# Altium PCB WiFi_Card_PCB.PcbDoc
Units mil, origin at the board's own origin, x right, y up, seen from the top; angles counter-clockwise.
Board outline 5600 x 4000 mil, 4 copper layers (Top Layer, Plane(Gnd), Layer 2, Bottom Layer), stack 23.756 mil thick; 152 components, 169 nets, 435 pads, 98 vias.
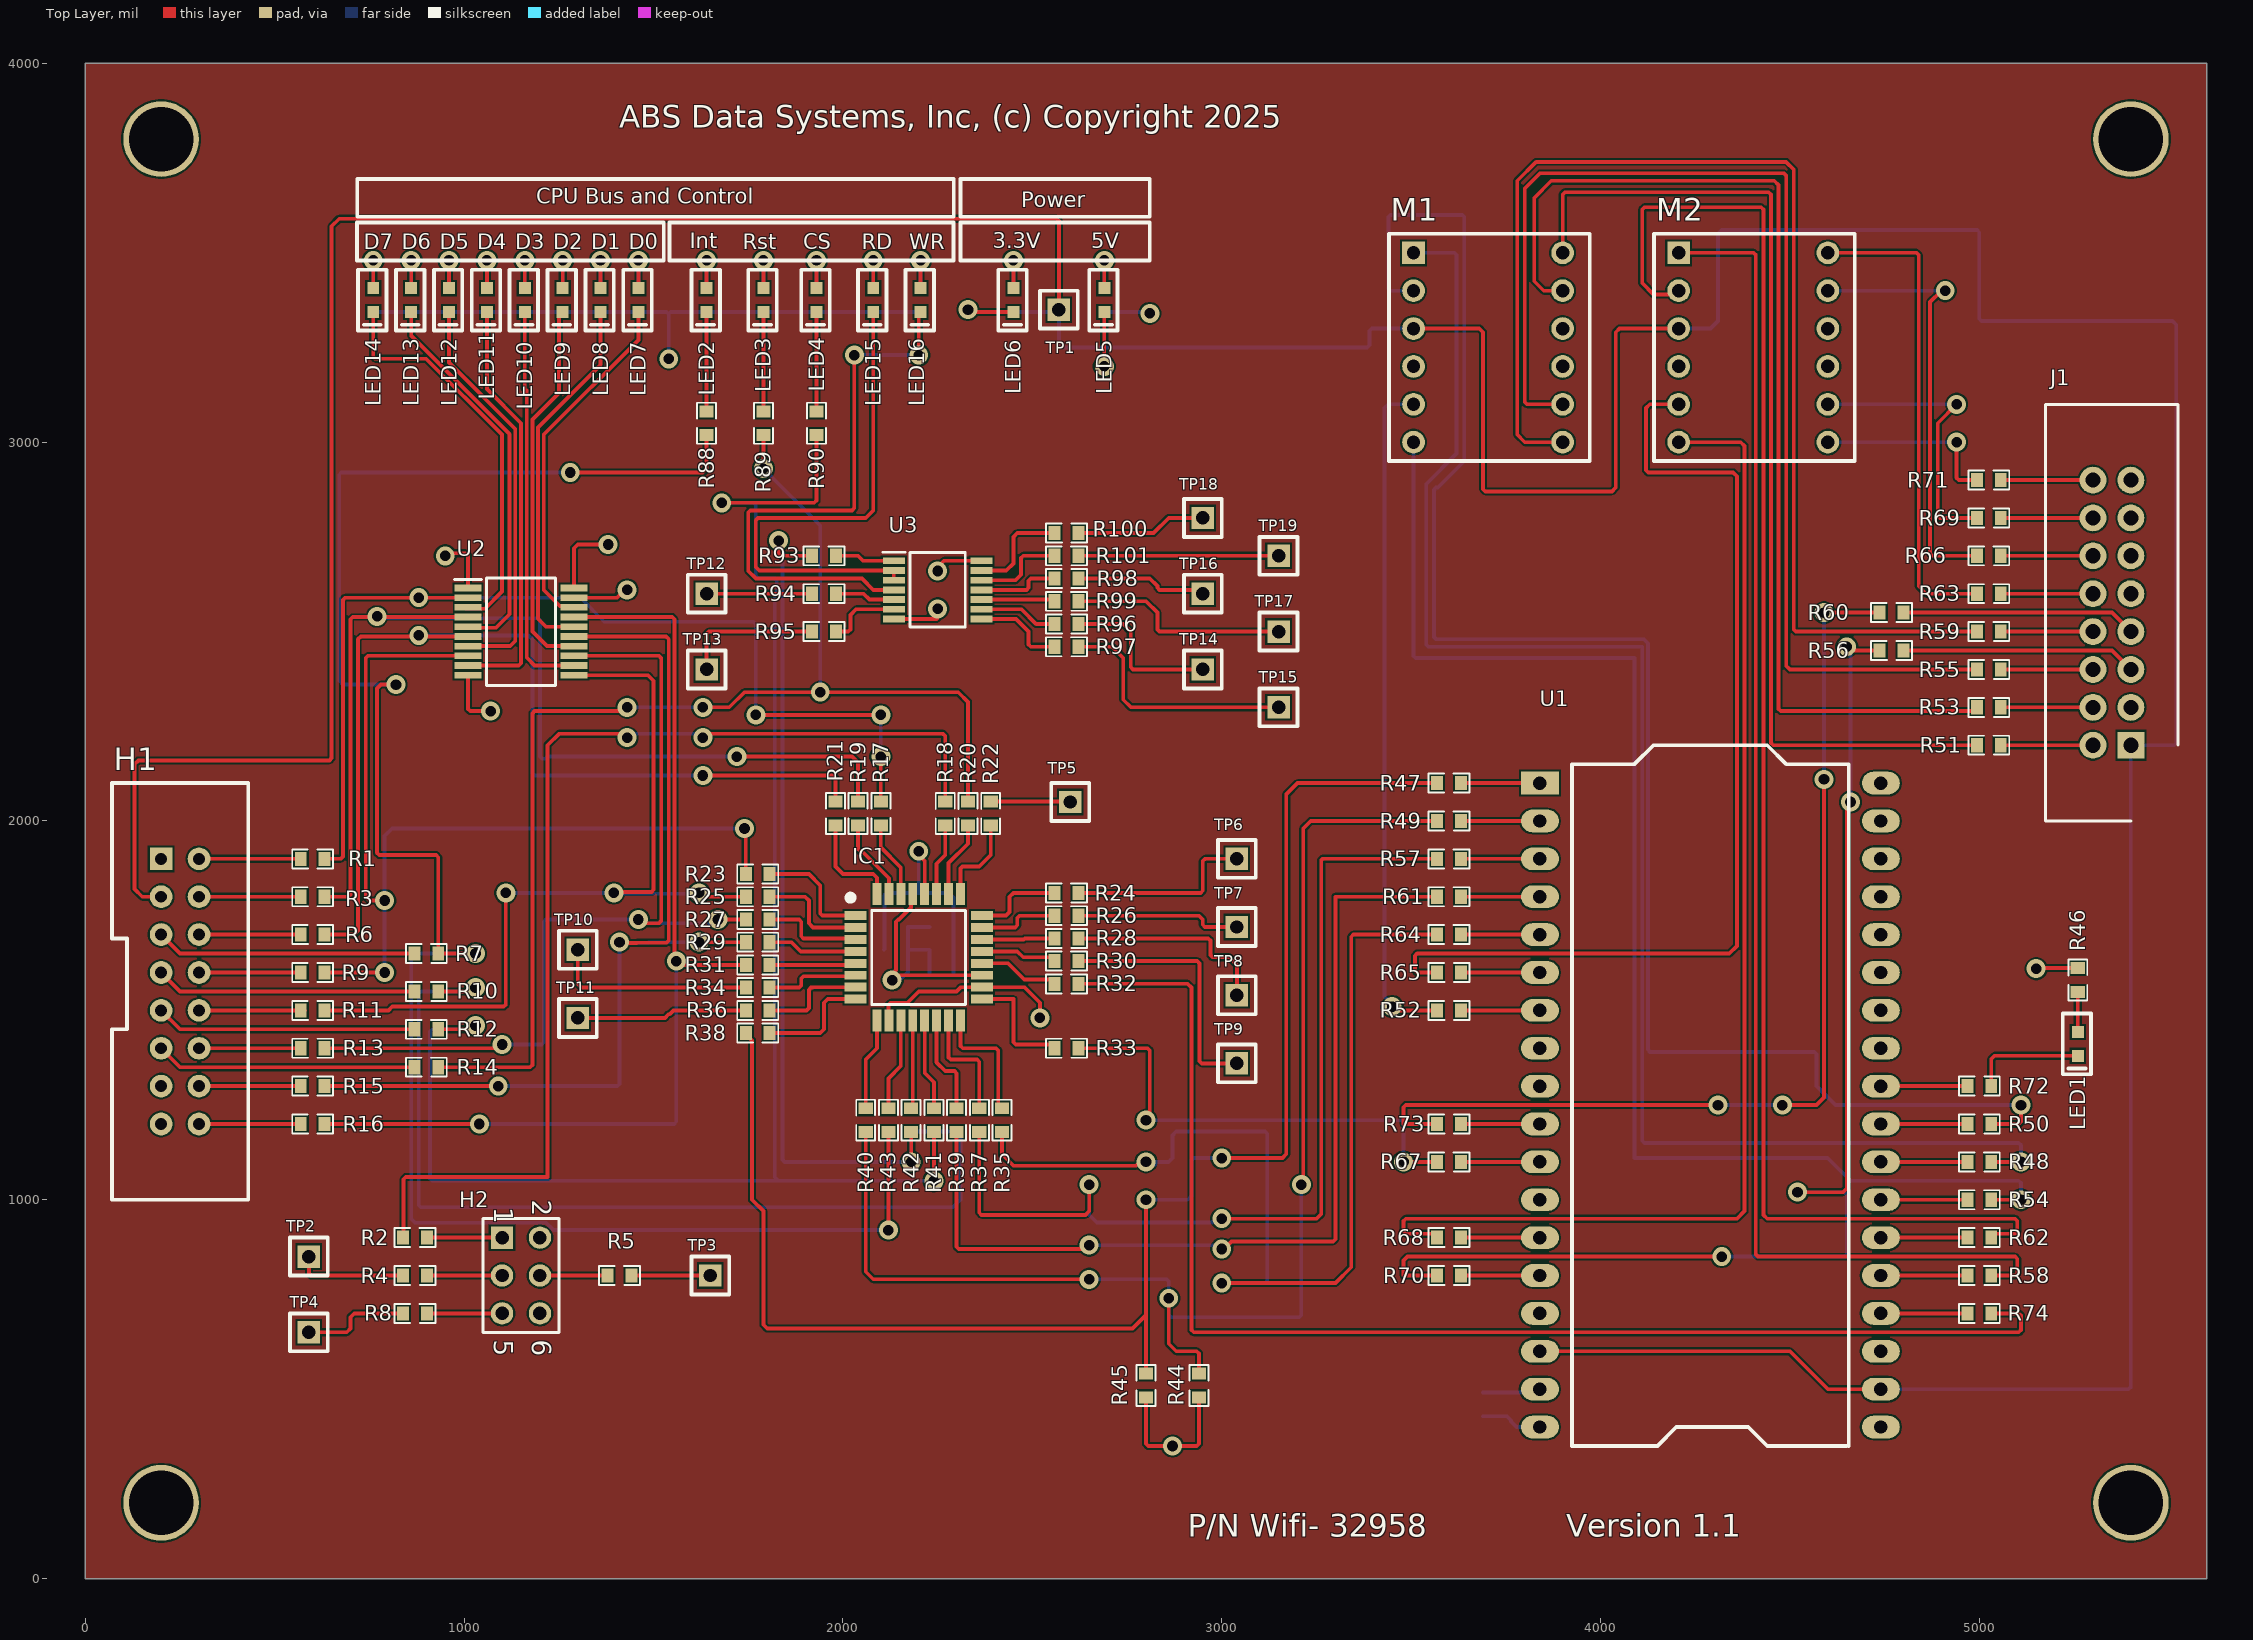
[diagram p0: Top Layer view]
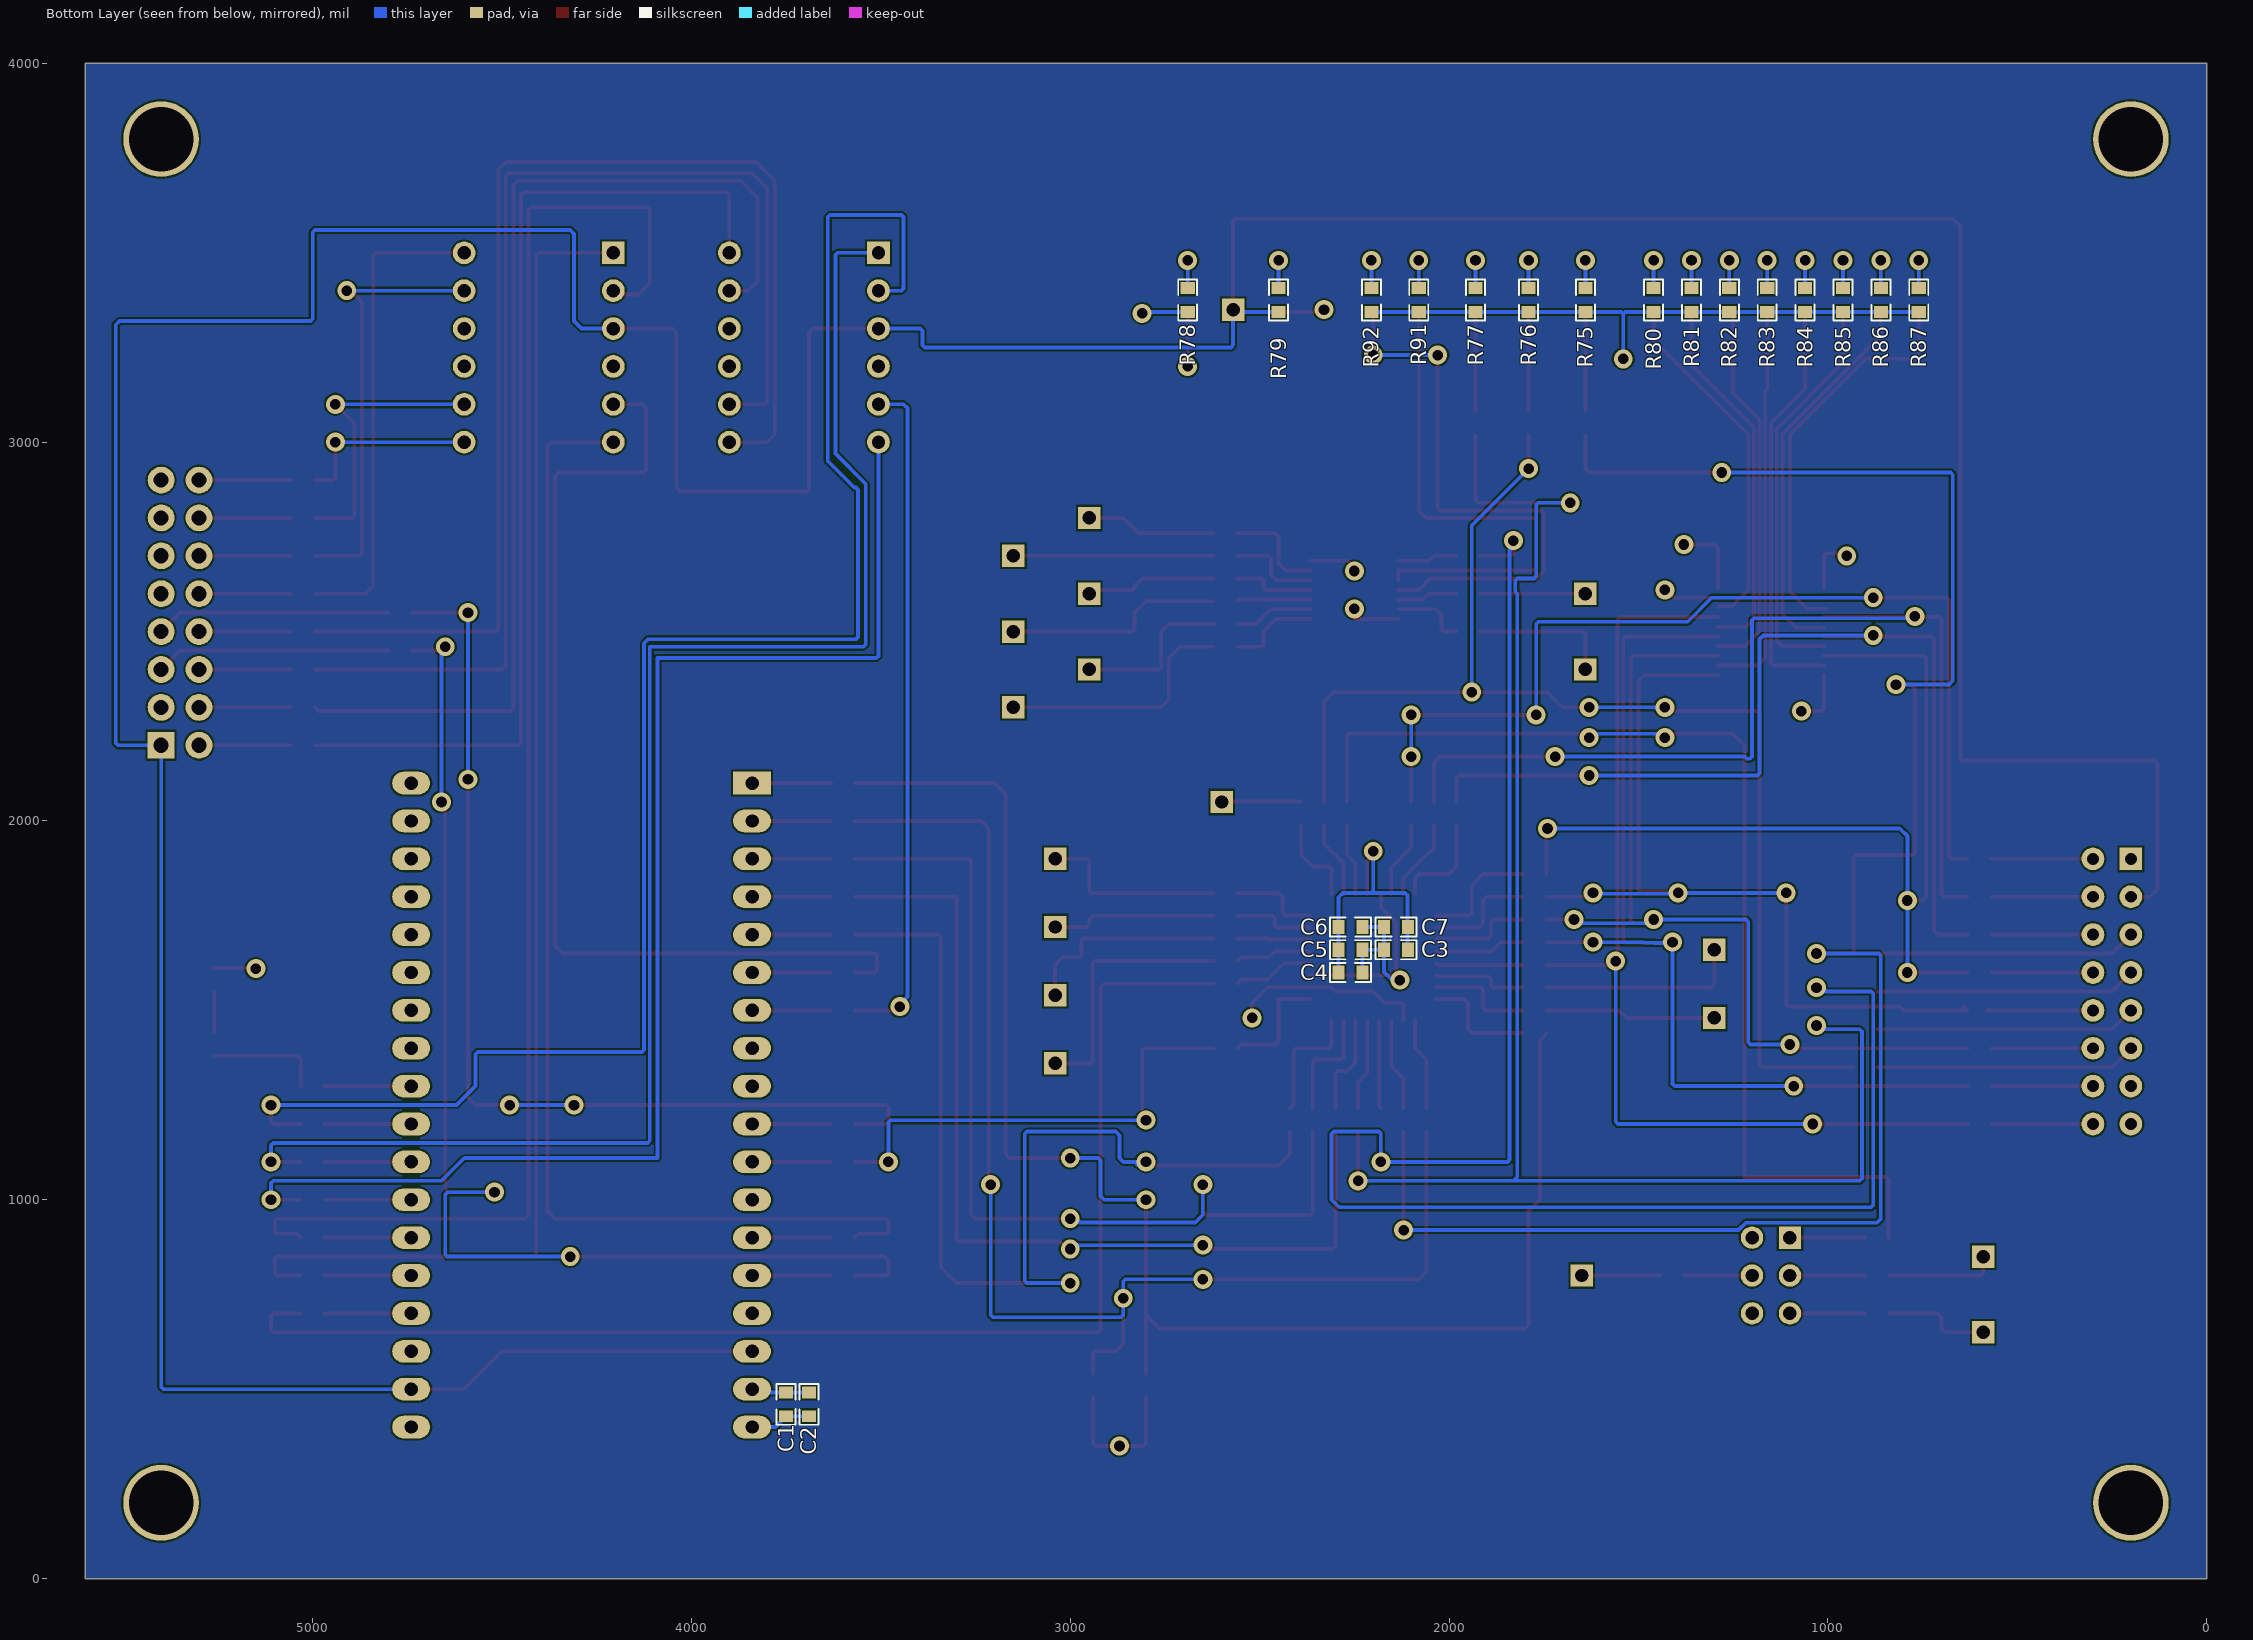
[diagram p1: Bottom Layer view, seen from below]
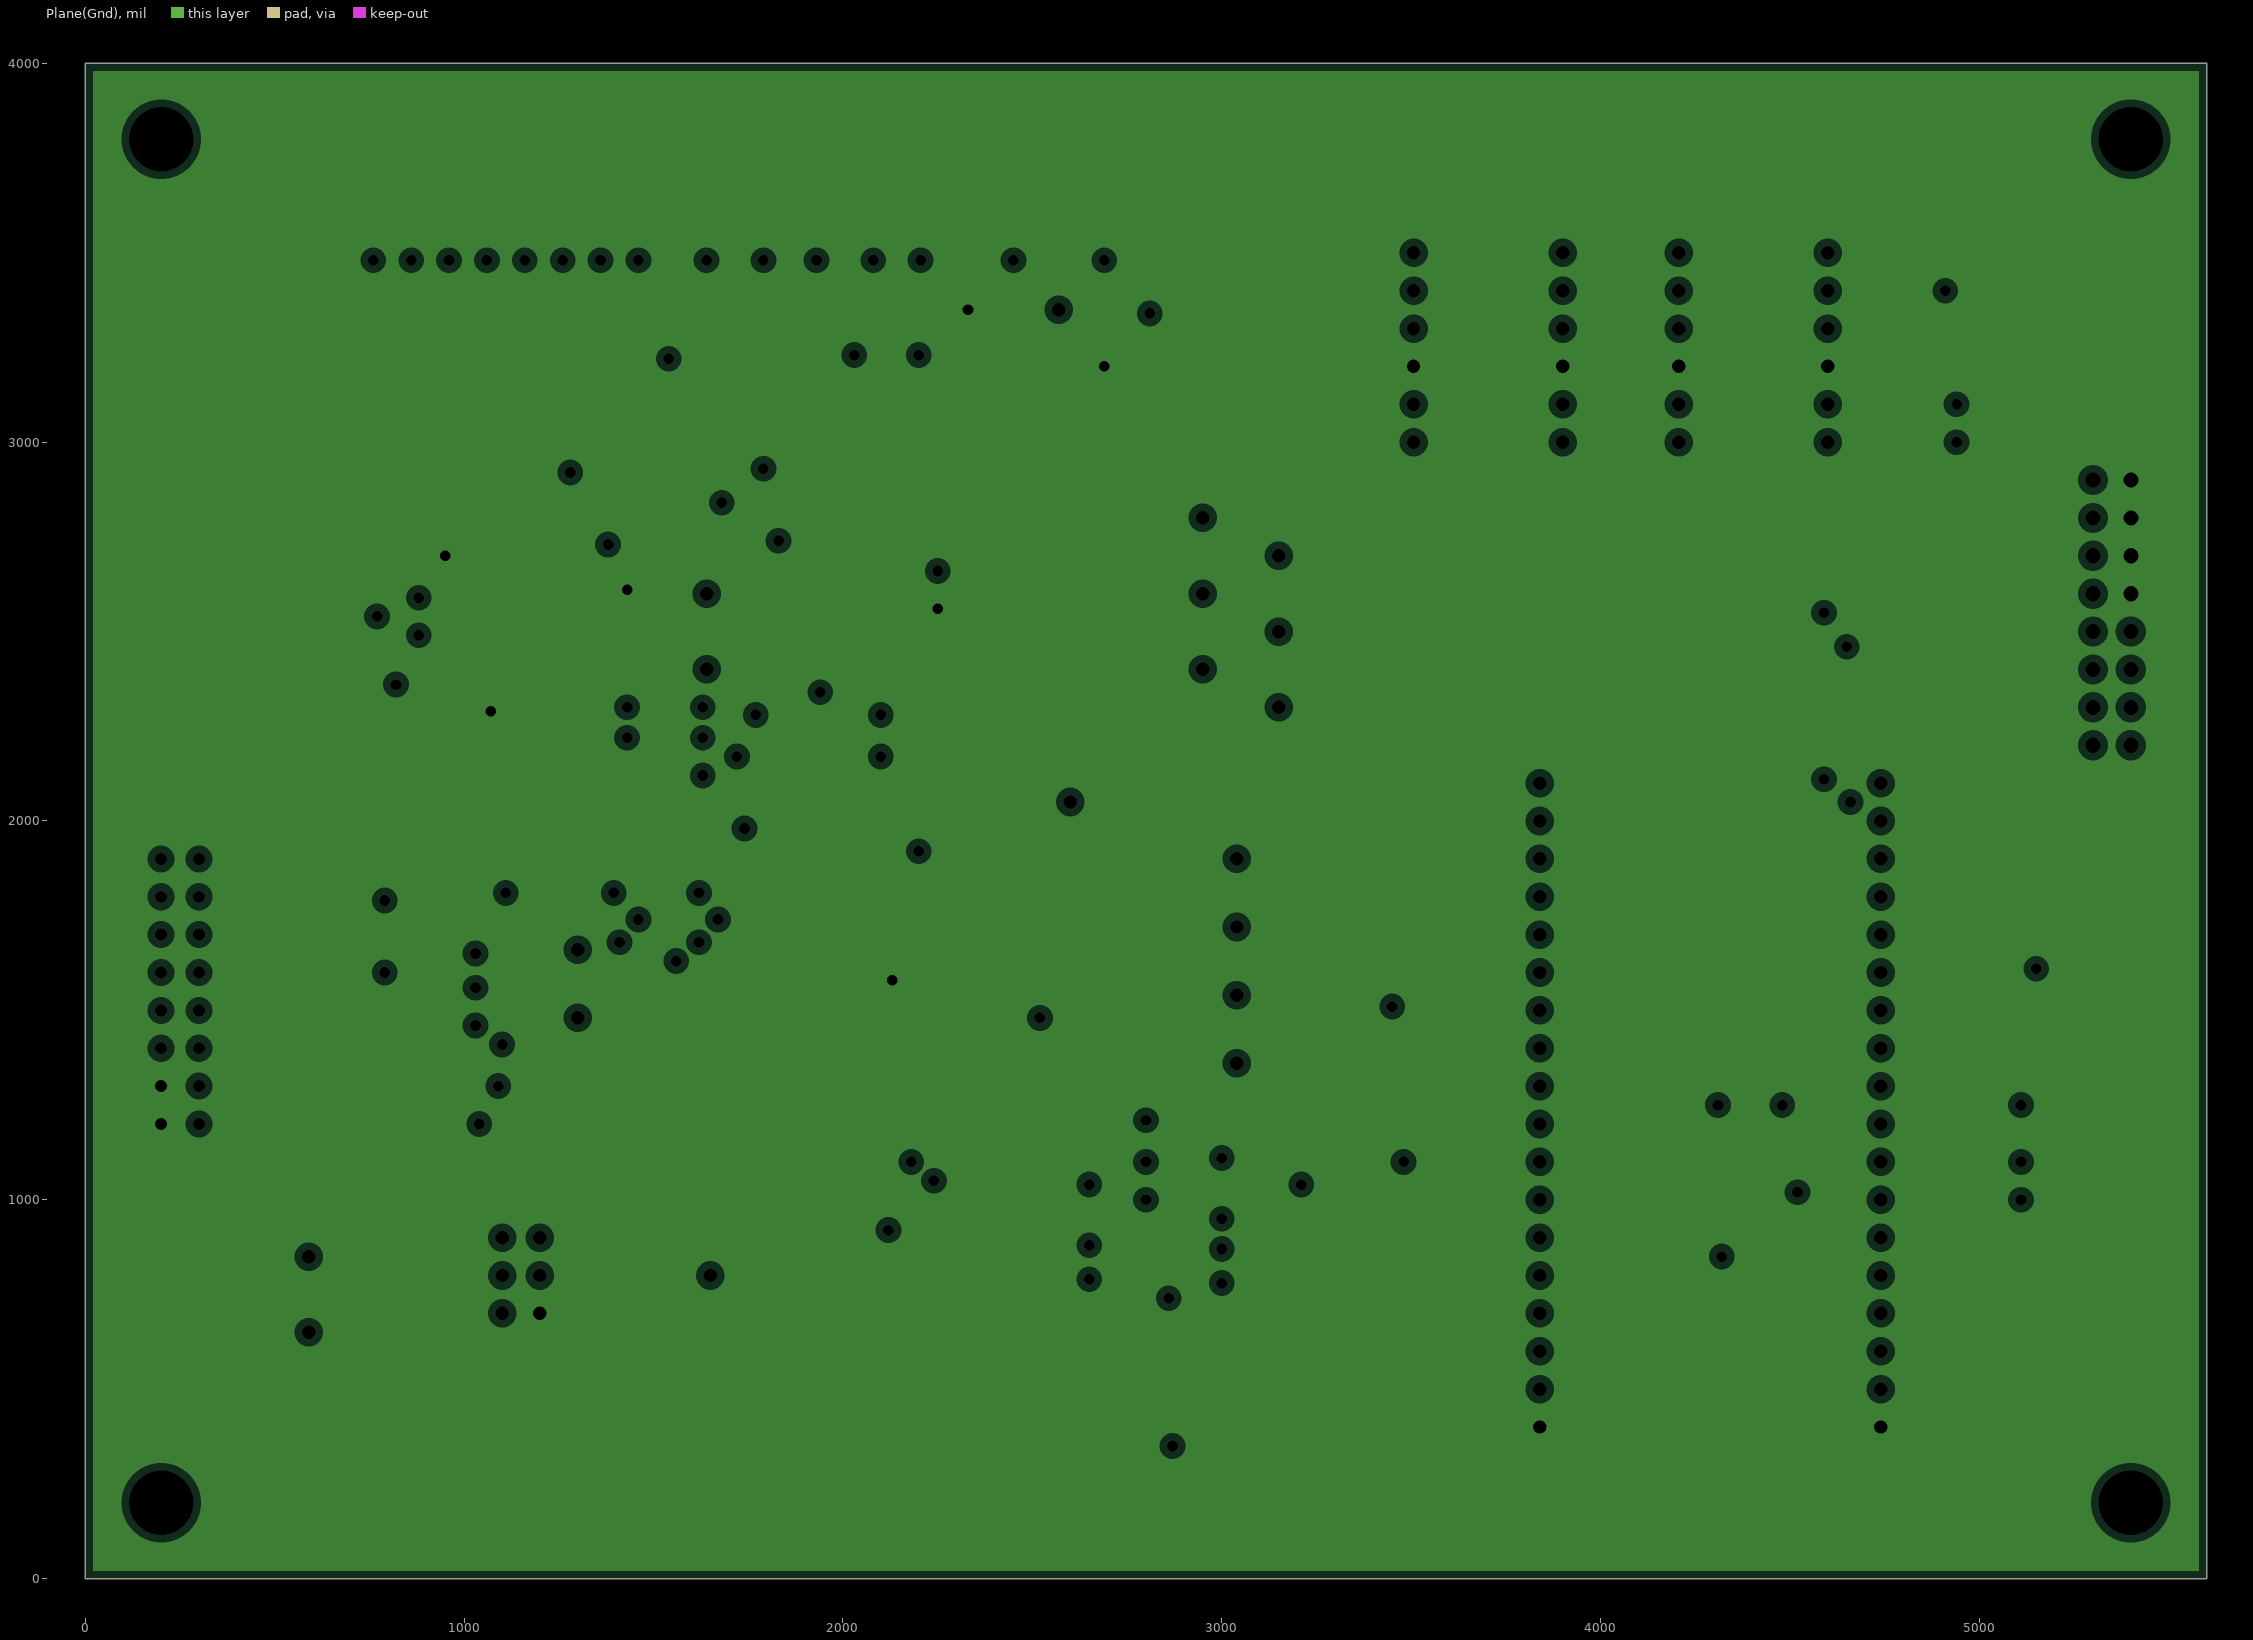
[diagram p2: Plane(Gnd), clearances drawn from the general rule]
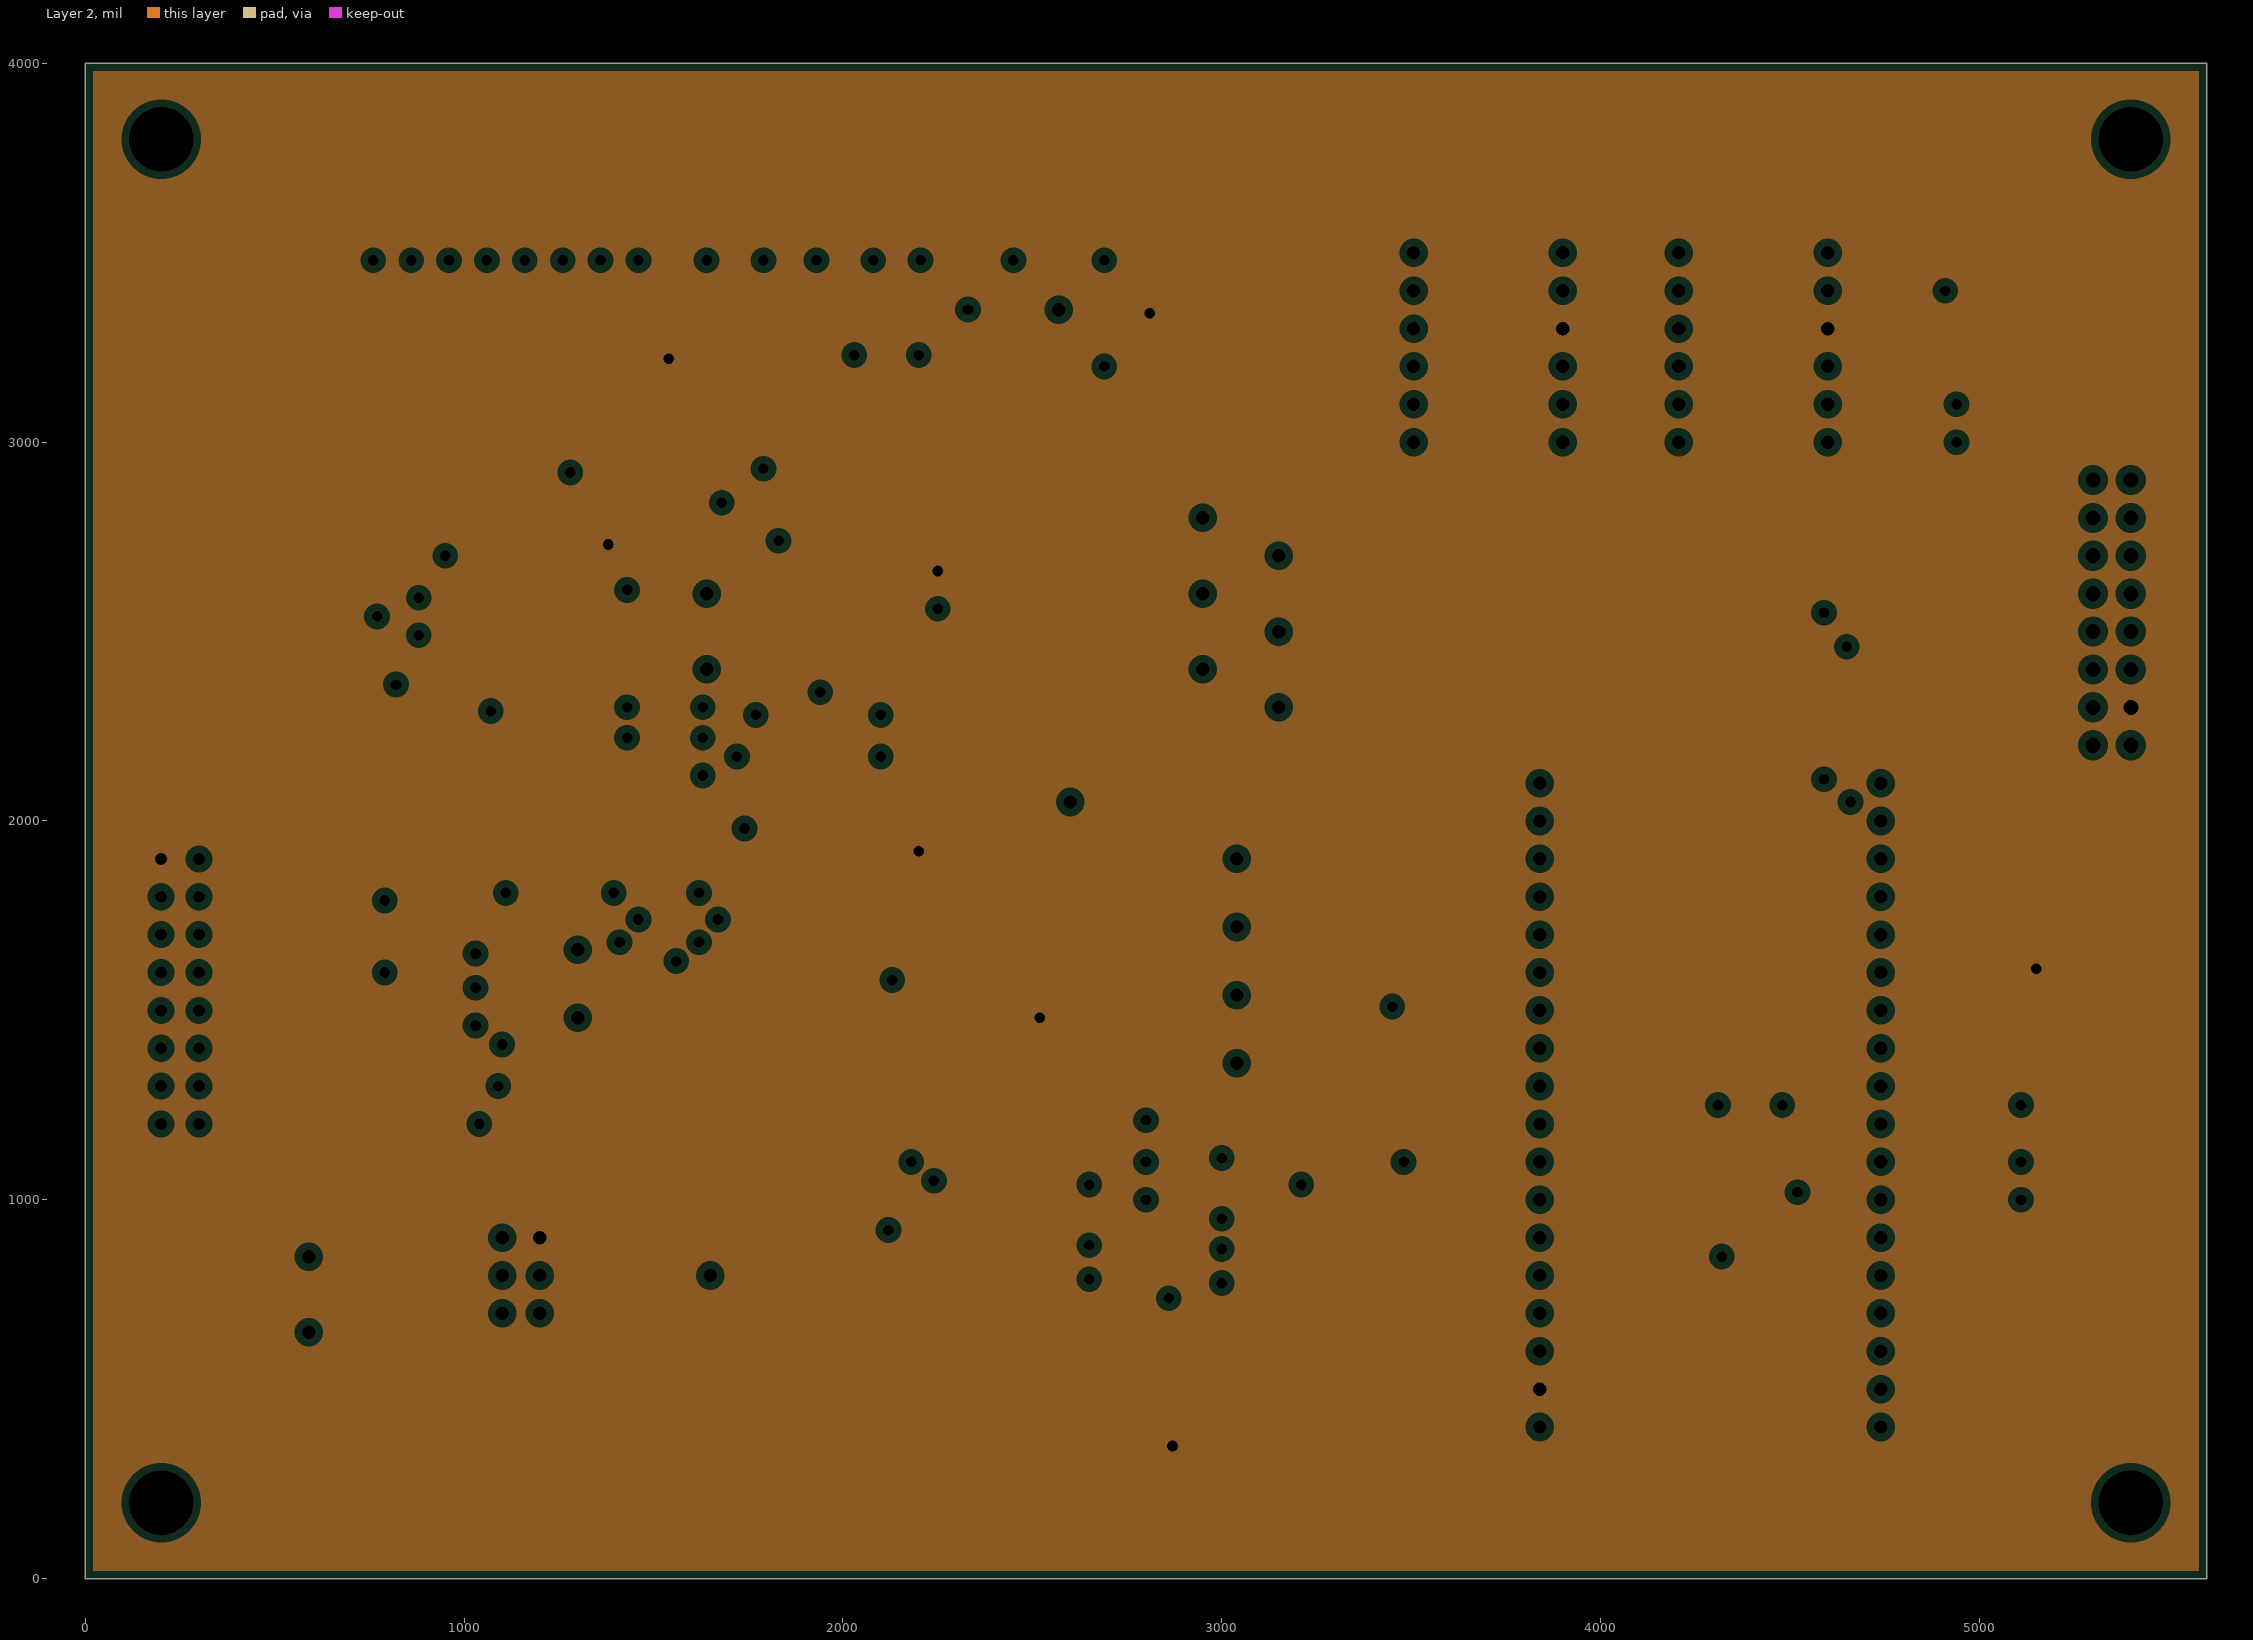
[diagram p3: Layer 2, clearances drawn from the general rule]
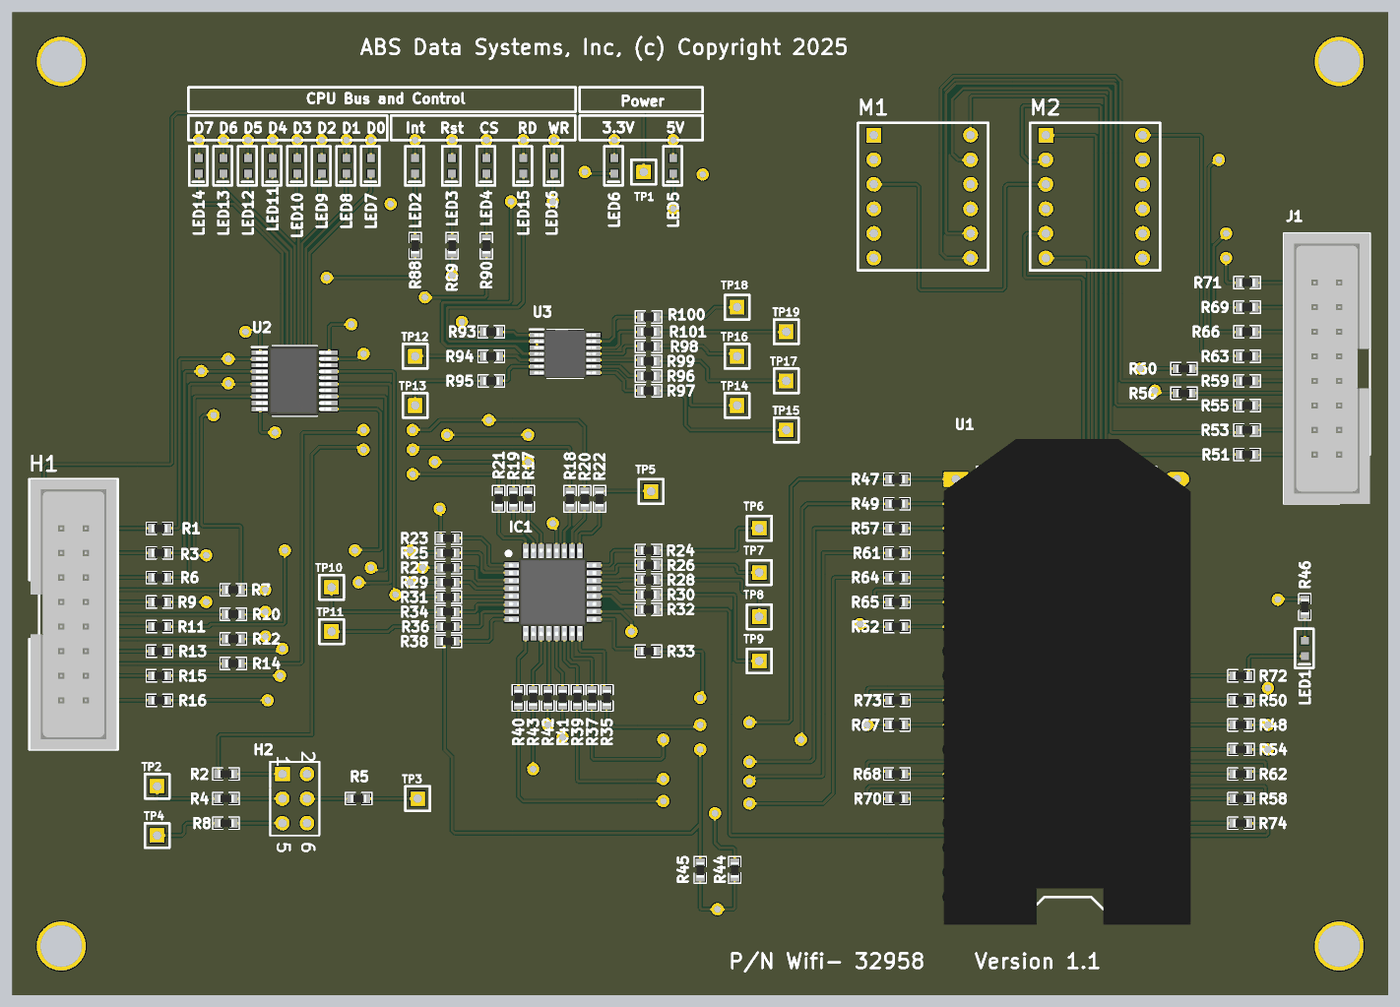
[diagram p4: 3D render of the assembled board from above, using the file's embedded part models]
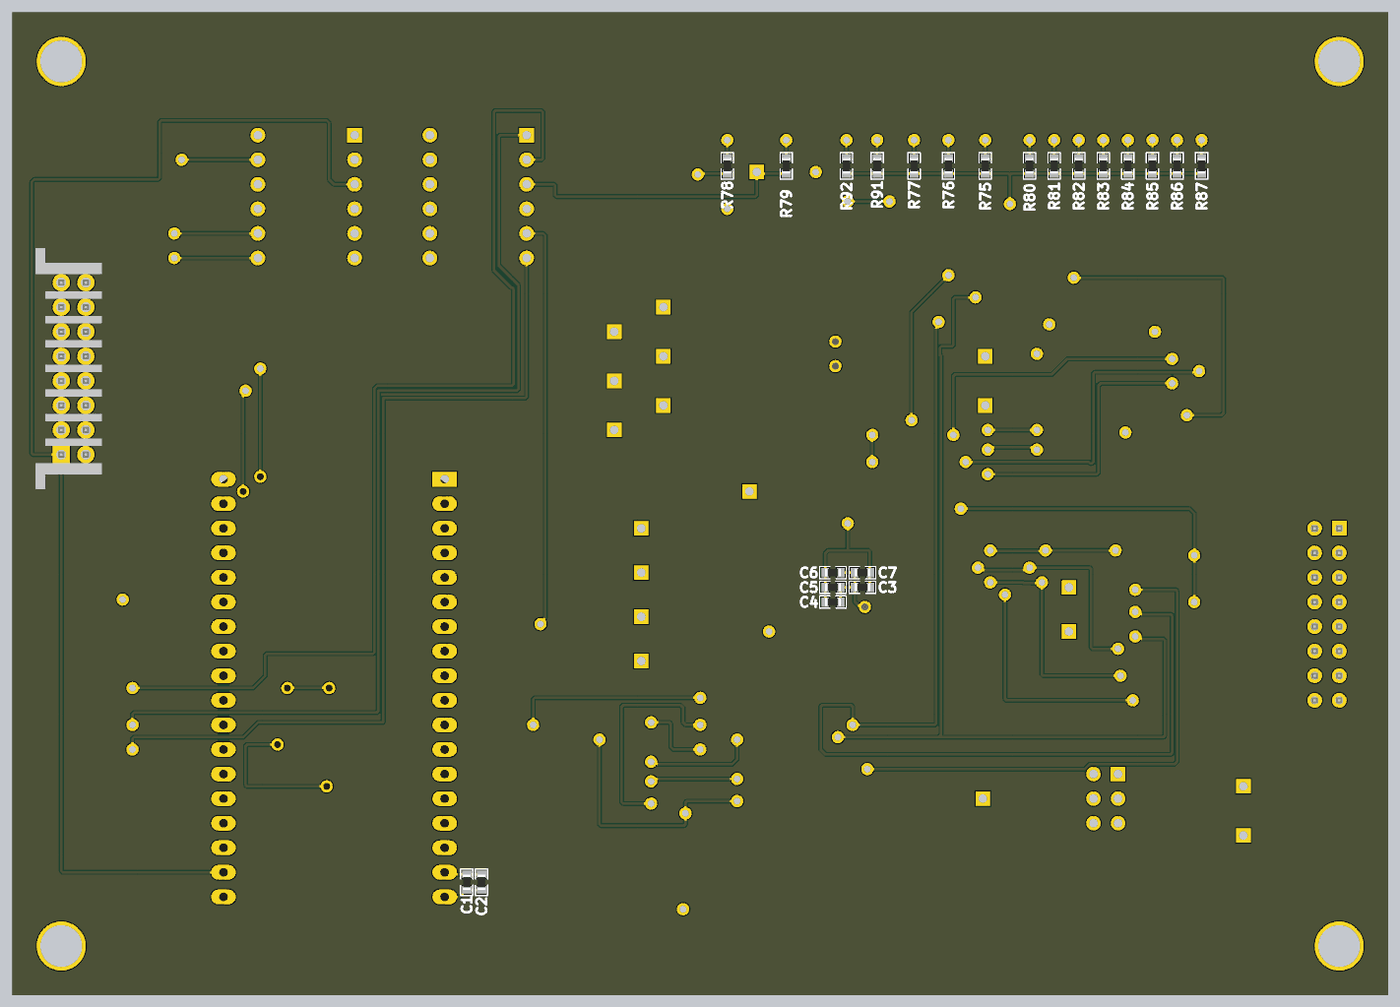
[diagram p5: 3D render of the assembled board from below, using the file's embedded part models]

## Layer stack, top to bottom
Top Solder: solder mask 0.4, Solder Resist, Dk 3.5
Top Layer: signal copper 1.4
Dielectric 2: prepreg 2.8, PP-006, Dk 4.1
Plane(Gnd): plane copper 1.378, net GND
Dielectric 1: dielectric 12.6, FR-4, Dk 4.8
Layer 2: plane copper 1.378, net +5
Plane(Power): prepreg 2.8, PP-006, Dk 4.1
Bottom Layer: signal copper 1.4
Bottom Solder: solder mask 0.4, Solder Resist, Dk 3.5

## Board outline
0,0 0,4000 5600,4000 5600,0

## Design rules (kind name [scope] priority, off if disabled: settings)
Clearance [All] p1: gap=5 ignorepadtopadclearanceinfootprint=FALSE
HoleSize [All] p1: absolutevalues=TRUE maxlimit=200 minlimit=1 maxpercent=80.000 minpercent=20.000
HoleToHoleClearance [All] p1: gap=5 allowstackedmicrovias=TRUE
MinimumSolderMaskSliver [All] p1: minsoldermaskwidth=5
PlaneClearance [All] p1: clearance=20
PlaneConnect [All] p1: planeconnectstyle=Relief reliefexpansion=20 reliefentries=4 reliefconductorwidth=10 reliefairgap=10
PolygonConnect [All] p1: connectstyle=Relief reliefconductorwidth=10 reliefentries=4 polygonreliefangle="90 Angle" airgapwidth=10
RoutingVias [All] p1: holewidth=28 width=50 viastyle="Through Hole" minholewidth=28 minwidth=50 maxholewidth=28 maxwidth=50
SilkToSilkClearance [All] p1: silktosilkclearance=4
SilkToSolderMaskClearance [IsPad] p1: minsilkscreentomaskgap=3.5 clearancetoexposedcopper=TRUE
SolderMaskExpansion [All] p1: expansion=4 istentingtop=FALSE
Width [All] p1: maxlimit=10 minlimit=5 preferedwidth=10 minimp=50.000000 maximp=50.000000 favimp=50.000000
23 further rules are at their usual default settings.

## Classes and differential pairs
component class WiFi_Card: C1 C2 C3 C4 C5 C6 C7 H1 H2 IC1 J1 LED1 M1 M2 R1 R2 R3 R4 R5 R6 R7 R8 R9 R10 R11 R12 R13 R14 R15 R16 R17 R18 R19 R20 R21 R22 R23 R24 R25 R26 R27 R28 R29 R30 R31 R32 R33 R34 R35 R36 R37 R38 R39 R40 R41 R42 R43 R46 R49 R53 R58 R63 R67 R68 R73 R79 R82 TP1 TP2 TP3 TP4 TP5 TP6 TP7 TP8 TP9 TP10 TP11 U3
component class WiFi_Card_Led_Monitor: LED2 LED3 LED4 LED5 LED6 LED7 LED8 LED9 LED10 LED11 LED12 LED13 LED14 LED15 LED16 R79 R82 R83 R88 R89 R96 R99 R100 R101 TP12 TP13 TP14 TP15 TP16 TP17 TP18 TP19 U3

## Components (designator, comment, footprint, x,y, rotation, side; value= is the part's Value field where it differs from the comment)
C1 "100nf" 0603 3750,460 r270 bottom
C2 "1uf" 0603 3690,460 r270 bottom
C3 "100nf" 0603 2140,1660 r0 bottom locked
C4 "1uf" 0603 2260,1600 r180 bottom locked
C5 "100nf" 0603 2260,1660 r180 bottom locked
C6 "1uf" 0603 2260,1720 r180 bottom locked
C7 "100nf" 0603 2140,1720 r0 bottom locked
H1 "Header_IDC_2x8" HEADER16 200,1900 r0 top
H2 "UDPI Programmer" HDR2X3 1100,900 r270 top
IC1 "AVR64DD32-I_PT" QFP80P900X900X120-32N 2200,1640 r0 top locked
J1 "70246-1604" SHDR16W99P254_2X8_2794X889X927P 5400,2200 r90 top
LED1 "green" 0603_DIODE 5260,1411.5 r90 top
LED2 "green" 0603_DIODE 1640,3375 r90 top locked
LED3 "green" 0603_DIODE 1790,3375 r90 top locked
LED4 "green" 0603_DIODE 1930,3375 r90 top locked
LED5 "green" 0603_DIODE 2690,3375 r90 top locked
LED6 "green" 0603_DIODE 2450,3375 r90 top locked
LED7 "green" 0603_DIODE 1460,3375 r90 top locked
LED8 "green" 0603_DIODE 1360,3375 r90 top locked
LED9 "green" 0603_DIODE 1260,3375 r90 top locked
LED10 "green" 0603_DIODE 1160,3375 r90 top locked
LED11 "green" 0603_DIODE 1060,3375 r90 top locked
LED12 "green" 0603_DIODE 960,3375 r90 top locked
LED13 "green" 0603_DIODE 860,3375 r90 top locked
LED14 "green" 0603_DIODE 760,3375 r90 top locked
LED15 "green" 0603_DIODE 2080,3375 r90 top locked
LED16 "red" 0603_DIODE 2205,3375 r90 top locked
M1 "Logic Level Module" LOGIC_LEVEL_MODULE 3506.3,3500 r0 top locked
M2 "Logic Level Module" LOGIC_LEVEL_MODULE 4206.3,3500 r0 top locked
R1 "0R" 0603 600,1900 r180 top
R2 "0R" 0603 870,900 r0 top
R3 "0R" 0603 600,1800 r180 top
R4 "0R" 0603 870,800 r0 top
R5 "0R" 0603 1410,800 r0 top
R6 "0R" 0603 600,1700 r180 top
R7 "0R" 0603 900,1650 r0 top
R8 "0R" 0603 870,700 r0 top
R9 "0R" 0603 600,1600 r180 top
R10 "0R" 0603 900,1550 r0 top
R11 "0R" 0603 600,1500 r180 top
R12 "0R" 0603 900,1450 r0 top
R13 "0R" 0603 600,1400 r180 top
R14 "0R" 0603 900,1350 r0 top
R15 "0R" 0603 600,1300 r180 top
R16 "0R" 0603 600,1200 r180 top
R17 "0R" 0603 2100,2020 r270 top locked
R18 "0R" 0603 2270,2020 r90 top locked
R19 "0R" 0603 2040,2020 r270 top locked
R20 "0R" 0603 2330,2020 r90 top locked
R21 "0R" 0603 1980,2020 r270 top locked
R22 "0R" 0603 2390,2020 r90 top locked
R23 "0R" 0603 1775,1860 r0 top locked
R24 "0R" 0603 2590,1810 r0 top locked
R25 "0R" 0603 1775,1800 r0 top locked
R26 "0R" 0603 2590,1750 r0 top locked
R27 "0R" 0603 1775,1740 r0 top locked
R28 "0R" 0603 2590,1690 r0 top locked
R29 "0R" 0603 1775,1680 r0 top locked
R30 "0R" 0603 2590,1630 r0 top locked
R31 "0R" 0603 1775,1620 r0 top locked
R32 "0R" 0603 2590,1570 r0 top locked
R33 "0R" 0603 2590,1400 r0 top locked
R34 "0R" 0603 1775,1560 r0 top locked
R35 "0R" 0603 2420,1210 r270 top locked
R36 "0R" 0603 1775,1500 r0 top locked
R37 "0R" 0603 2360,1210 r270 top locked
R38 "0R" 0603 1775,1440 r0 top locked
R39 "0R" 0603 2300,1210 r270 top locked
R40 "0R" 0603 2060,1210 r90 top locked
R41 "0R" 0603 2240,1210 r270 top locked
R42 "0R" 0603 2180,1210 r270 top locked
R43 "0R" 0603 2120,1210 r270 top locked
R44 "4.7k" 0603 2940,510 r270 top
R45 "4.7k" 0603 2800,510 r270 top
R46 "180" 0603 5260,1580 r90 top
R47 "0R" 0603 3600,2100 r0 top
R48 "0R" 0603 5000,1100 r0 top locked
R49 "0R" 0603 3600,2000 r0 top
R50 "0R" 0603 5000,1200 r0 top locked
R51 "0R" 0603 5025,2200 r0 top locked
R52 "0R" 0603 3600,1500 r180 top
R53 "0R" 0603 5025,2300 r0 top locked
R54 "0R" 0603 5000,1000 r0 top locked
R55 "0R" 0603 5025,2400 r0 top locked
R56 "0R" 0603 4768.5,2450 r180 top locked
R57 "0R" 0603 3600,1900 r0 top
R58 "0R" 0603 5000,800 r0 top locked
R59 "0R" 0603 5025,2500 r0 top locked
R60 "0R" 0603 4768.5,2550 r180 top locked
R61 "0R" 0603 3600,1800 r0 top
R62 "0R" 0603 5000,900 r0 top locked
R63 "0R" 0603 5025,2600 r0 top locked
R64 "0R" 0603 3600,1700 r0 top
R65 "0R" 0603 3600,1600 r180 top
R66 "0R" 0603 5025,2700 r0 top locked
R67 "0R" 0603 3600,1100 r0 top
R68 "0R" 0603 3600,900 r180 top
R69 "0R" 0603 5025,2800 r0 top locked
R70 "0R" 0603 3600,800 r180 top
R71 "0R" 0603 5025,2900 r0 top locked
R72 "0R" 0603 5000,1300 r180 top locked
R73 "0R" 0603 3600,1200 r180 top
R74 "0R" 0603 5000,700 r180 top locked
R75 "180" 0603 1640,3375 r270 bottom locked
R76 "180" 0603 1790,3375 r270 bottom locked
R77 "180" 0603 1930,3375 r270 bottom locked
R78 "180" 0603 2690,3375 r270 bottom locked
R79 "180" 0603 2450,3375 r270 bottom locked
R80 "180" 0603 1460,3375 r270 bottom locked
R81 "180" 0603 1360,3375 r270 bottom locked
R82 "180" 0603 1260,3375 r270 bottom locked
R83 "180" 0603 1160,3375 r270 bottom locked
R84 "180" 0603 1060,3375 r270 bottom locked
R85 "180" 0603 960,3375 r270 bottom locked
R86 "180" 0603 860,3375 r270 bottom locked
R87 "180" 0603 760,3375 r270 bottom locked
R88 "0R" 0603 1640,3050 r90 top locked
R89 "0R" 0603 1790,3050 r90 top locked
R90 "0R" 0603 1930,3050 r90 top locked
R91 "180" 0603 2080,3375 r270 bottom locked
R92 "180" 0603 2205,3375 r270 bottom locked
R93 "0R" 0603 1950,2700 r0 top locked
R94 "0R" 0603 1950,2600 r0 top locked
R95 "0R" 0603 1950,2500 r180 top locked
R96 "0R" 0603 2590,2520 r180 top locked
R97 "0R" 0603 2590,2460 r0 top locked
R98 "0R" 0603 2590,2640 r180 top locked
R99 "0R" 0603 2590,2580 r0 top locked
R100 "0R" 0603 2590,2760 r180 top locked
R101 "0R" 0603 2590,2700 r0 top locked
TP1 "TP" TP 2570,3350 r0 top
TP2 "TP" TP 590,850 r0 top
TP3 "TP" TP 1650,800 r0 top
TP4 "TP" TP 590,650 r0 top
TP5 "TP" TP 2600,2050 r0 top
TP6 "TP" TP 3040,1900 r0 top
TP7 "TP" TP 3040,1720 r0 top
TP8 "TP" TP 3040,1540 r0 top
TP9 "TP" TP 3040,1360 r0 top
TP10 "TP" TP 1300,1660 r0 top locked
TP11 "TP" TP 1300,1480 r0 top locked
TP12 "TP" TP 1640,2600 r0 top locked
TP13 "TP" TP 1640,2400 r0 top locked
TP14 "TP" TP 2950,2400 r0 top locked
TP15 "TP" TP 3150,2300 r0 top locked
TP16 "TP" TP 2950,2600 r0 top locked
TP17 "TP" TP 3150,2500 r0 top locked
TP18 "TP" TP 2950,2800 r0 top locked
TP19 "TP" TP 3150,2700 r0 top locked
U1 "HTIT-WB32" DIP36WIDE 3840,2100 r0 top locked (schematic designator U*1)
U2 "SN74ABT240ADBR" SOP65P780X200-20N 1150,2500 r0 top locked
U3 "SN74AC04PWR" SOP65P640X120-14N 2250,2610 r0 top locked

## Footprints (in the part's own frame and the unit in brackets; to place one, negate y for a bottom-side part, rotate by r counter-clockwise, add the part's x,y. Pads: shape width x height; smd on the part's side, far side on the other; paste and mask are expansions set on the pad)
0603 [mm]
  rect 0.8x0.95 smd: 1(-0.8,0) 2(0.8,0)
  silkscreen extent -1.37,-0.64 1.37,0.64, body extent -0.8,-0.4 0.8,0.4, height 0.55
0603_DIODE [mm]
  rect 0.8x0.8 smd: 1(-0.8,0) 2(0.8,0)
  silkscreen extent -2.03,-0.89 2.03,1.02
DIP36WIDE [mil]
  rect 100x60 hole 35.43: 1(0,0)
  oval 100x60 hole 35.43: 2(0,-100) 3(0,-200) 4(0,-300) 5(0,-400) 6(0,-500) 7(0,-600) 8(0,-700) 9(0,-800) 10(0,-900) 11(0,-1000) 12(0,-1100) 13(0,-1200) 14(0,-1300) 15(0,-1400) 16(0,-1500) 17(0,-1600) 18(0,-1700) 19(900,-1700) 20(900,-1600) 21(900,-1500) 22(900,-1400) 23(900,-1300) 24(900,-1200) 25(900,-1100) 26(900,-1000) 27(900,-900) 28(900,-800) 29(900,-700) 30(900,-600) 31(900,-500) 32(900,-400) 33(900,-300) 34(900,-200) 35(900,-100) 36(900,0)
  silkscreen extent 85,-1750 815,100, body extent -49,-1813 955,163, height 197
HDR2X3 [mm] "Connector; Header; 3x2 Position"
  rect 1.5x1.5 hole 0.9: 1(0,0)
  round 1.5 hole 0.9: 2(0,2.54) 3(2.54,0) 4(2.54,2.54) 5(5.08,0) 6(5.08,2.54)
  silkscreen extent -1.27,-1.27 6.35,3.81
HEADER16 [mil]
  rect 60x60 hole 31.5: 1(0,0)
  round 60 hole 31.5: 2(100,0) 3(0,-100) 4(100,-100) 5(0,-200) 6(100,-200) 7(0,-300) 8(100,-300) 9(0,-400) 10(100,-400) 11(0,-500) 12(100,-500) 13(0,-600) 14(100,-600) 15(0,-700) 16(100,-700)
  silkscreen extent -130,-900 230,200, body extent -125,-900 225,200, height 360
LOGIC_LEVEL_MODULE [mil]
  rect 60x60 hole 35.43: 1(0,0)
  round 60 hole 35.43: 2(0,-100) 3(0,-200) 4(0,-300) 5(0,-400) 6(0,-500) 7(393.7,-500) 8(393.7,-400) 9(393.7,-300) 10(393.7,-200) 11(393.7,-100) 12(393.7,0)
  silkscreen extent -65,-550 465,50
QFP80P900X900X120-32N [mm]
  rect 1.475x0.6 smd: 1(-4.238,2.8) 2(-4.238,2) 3(-4.238,1.2) 4(-4.238,0.4) 5(-4.238,-0.4) 6(-4.238,-1.2) 7(-4.238,-2) 8(-4.238,-2.8) 17(4.238,-2.8) 18(4.238,-2) 19(4.238,-1.2) 20(4.238,-0.4) 21(4.238,0.4) 22(4.238,1.2) 23(4.238,2) 24(4.238,2.8)
  rect 0.6x1.475 smd: 9(-2.8,-4.238) 10(-2,-4.238) 11(-1.2,-4.238) 12(-0.4,-4.238) 13(0.4,-4.238) 14(1.2,-4.238) 15(2,-4.238) 16(2.8,-4.238) 25(2.8,4.238) 26(2,4.238) 27(1.2,4.238) 28(0.4,4.238) 29(-0.4,4.238) 30(-1.2,4.238) 31(-2,4.238) 32(-2.8,4.238)
  silkscreen extent -4.77,-3.15 3.15,4.2, body extent -4.5,-4.5 4.5,4.5, height 1.2
SHDR16W99P254_2X8_2794X889X927P [mm]
  rect 1.8x1.8 / inner round 1.8 / far side rect 1.8x1.8 hole 1.016: 1(0,0)
  round 1.8 hole 1.016: 2(0,2.54) 3(2.54,0) 4(2.54,2.54) 5(5.08,0) 6(5.08,2.54) 7(7.62,0) 8(7.62,2.54) 9(10.16,0) 10(10.16,2.54) 11(12.7,0) 12(12.7,2.54) 13(15.24,0) 14(15.24,2.54) 15(17.78,0) 16(17.78,2.54)
  silkscreen extent -5.08,-3.17 22.86,5.72, body extent -5.08,-3.18 22.86,5.72, height 8.38
SOP65P640X120-14N [mm]
  rect 1.475x0.45 smd: 1(-2.938,1.95) 2(-2.938,1.3) 3(-2.938,0.65) 4(-2.938,0) 5(-2.938,-0.65) 6(-2.938,-1.3) 7(-2.938,-1.95) 8(2.938,-1.95) 9(2.938,-1.3) 10(2.938,-0.65) 11(2.938,0) 12(2.938,0.65) 13(2.938,1.3) 14(2.938,1.95)
  silkscreen extent -3.67,-2.5 1.85,2.52, body extent -3.2,-2.5 3.2,2.5, height 1.13
SOP65P780X200-20N [mm]
  rect 1.8x0.45 smd: 1(-3.55,2.925) 2(-3.55,2.275) 3(-3.55,1.625) 4(-3.55,0.975) 5(-3.55,0.325) 6(-3.55,-0.325) 7(-3.55,-0.975) 8(-3.55,-1.625) 9(-3.55,-2.275) 10(-3.55,-2.925) 11(3.55,-2.925) 12(3.55,-2.275) 13(3.55,-1.625) 14(3.55,-0.975) 15(3.55,-0.325) 16(3.55,0.325) 17(3.55,0.975) 18(3.55,1.625) 19(3.55,2.275) 20(3.55,2.925)
  silkscreen extent -4.45,-3.6 2.3,3.6, body extent -4.03,-3.6 3.77,3.6, height 1.9
TP [mm] "Test Point"
  rect 1.5x1.5 hole 0.9: 1(0,0)
  silkscreen extent -1.27,-1.27 1.27,1.27

## Part data
C1 C3 C5 C7: library part CL10B104JB8NNNC, "Samsung Electro-Mechanics 0603 100nf"
C2 C4 C6: library part CL10B105KA8NNNL, "Samsung Electro-Mechanics 0603 1uf"
H1: "16 Pin 2x8 Through Hold IDC Connector", Color=Black, Manufacturer=Samtec, Manufacturer Part Number=TST-108-01-G-D, Max Operating Temperature=125°C, Min Operating Temperature=-55°C, Supplier Part Number 1=SAM10835-ND, Category="Headers and Wire Housings", ComponentLink1Description=https://datasheet.ciiva.com/739/tst-mkt-739845.pdf?src-supplier=Digi-Key, ComponentLink1URL=https://datasheet.ciiva.com/739/tst-mkt-739845.pdf?src-supplier=Digi-Key, ComponentLink2Description=https://datasheet.ciiva.com/10018/htst-10018510.pdf?src-supplier=Avnet, ComponentLink2URL=https://datasheet.ciiva.com/10018/htst-10018510.pdf?src-supplier=Avnet, Connector Type="Male Pin", Contact Material=Bronze, Contact Mating Length=0.25inch, Contact Plating=Gold, Depth=9.27mm, Gender=Male, Housing Color=Black, Housing Material=Polyester, Length=27.94mm, Mount="Through Hole", Number of Contacts=16, Number of Positions=16, Number of Rows=2, Orientation=Straight, Packaging=Rail/Tube, Pitch=2.54mm, Pricing 1="1=2.85000, 10=2.73600, 100=2.28000, 500=1.93800, 1000=1.65300, 5000=1.48200 (USD)", REACH SVHC="No SVHC", RoHS=Yes, Row Spacing=0.1inch, Stock 1=227, Supplier 1=Digi-Key, Termination=Solder
H2: "6 Pin 2X3 Through Hole Header"
IC1: "Integrated Circuit", Manufacturer_Name=Microchip, Manufacturer_Part_Number="AVR64DD32-I/PT | MULTI-VOLTAGE I/O", Datasheet Link=https://www.microchip.com/en-us/product/AVR64DD32, Height=1.2mm
J1: "Molex C-GRID 70246, 2.54mm Pitch, 16 Way, 2 Row, Straight PCB Header, Through Hole", Manufacturer_Name=Molex, Mouser Part Number=538-70246-1604, Datasheet Link=https://www.molex.com/pdm_docs/sd/702461604_sd.pdf, Geometry.Height=9.27mm, Manufacturer_Part_Number=70246-1604, Mouser Price/Stock=https://www.mouser.co.uk/ProductDetail/Molex/70246-1604?qs=KUIzHt%2Fe91njhb67Cjmalw%3D%3D
LED1 LED2 LED3 LED4 LED5 LED6 LED7 LED8 LED9 LED10 LED11 LED12 LED13 LED14 LED15: library part 150060GS75000, "Wurth Elektronik 0603 green", Case Code (Imperial)=0603, Case Code (Metric)=1608, Color=Green, Forward Current=30mA, Forward Voltage=3.2V, Manufacturer="Wurth Electronics", Max Operating Temperature=85°C, Min Operating Temperature=-40°C, Package Quantity=4000, Test Current=20mA, Case/Package=0603, Category=LEDs, ComponentLink1Description=https://datasheet.ciiva.com/29562/150060gs75000-29562868.pdf?src-supplier=Digi-Key, ComponentLink1URL=https://datasheet.ciiva.com/29562/150060gs75000-29562868.pdf?src-supplier=Digi-Key, ComponentLink2Description=https://datasheet.ciiva.com/29279/759427-da-01-en-chipled-0603-w-kl-gruen-150060gs75000-29279201.pdf?src-supplier=Conrad, ComponentLink2URL=https://datasheet.ciiva.com/29279/759427-da-01-en-chipled-0603-w-kl-gruen-150060gs75000-29279201.pdf?src-supplier=Conrad, ComponentLink3Description=https://datasheet.ciiva.com/29562/150060gs75000-29562869.pdf?src-supplier=Digi-Key, ComponentLink3URL=https://datasheet.ciiva.com/29562/150060gs75000-29562869.pdf?src-supplier=Digi-Key, ComponentLink4Description=https://datasheet.ciiva.com/29562/150060gs75000-29562870.pdf?src-supplier=Digi-Key, ComponentLink4URL=https://datasheet.ciiva.com/29562/150060gs75000-29562870.pdf?src-supplier=Digi-Key, Dominant Wavelength=520nm, Height=0.7mm, Lead Free="Lead Free", Length=1.6mm, Lens Style=Clear,Rectangular, Luminous Intensity=430mcd, Manufacturer Part Number=150060GS75000, Mount="Surface Mount", Packaging="Tape and Reel", Pricing 1="1=0.14000, 50=0.13300, 100=0.11400, 500=0.09900 (USD)", REACH SVHC=Unknown, RoHS=Yes, Stock 1=71509, Supplier 1=Digi-Key, Viewing Angle=140°, Wavelength=520nm, Width=0.8mm
LED16: library part 150060RS75000, "Wurth Elektronik 0603 red", Case Code (Imperial)=0603, Case Code (Metric)=1608, Color=Green, Forward Current=30mA, Forward Voltage=3.2V, Manufacturer="Wurth Electronics", Manufacturer Part Number=150060GS75000, Max Operating Temperature=85°C, Min Operating Temperature=-40°C, Package Quantity=4000, Test Current=20mA, Case/Package=0603, Category=LEDs, ComponentLink1Description=https://datasheet.ciiva.com/29562/150060gs75000-29562868.pdf?src-supplier=Digi-Key, ComponentLink1URL=https://datasheet.ciiva.com/29562/150060gs75000-29562868.pdf?src-supplier=Digi-Key, ComponentLink2Description=https://datasheet.ciiva.com/29279/759427-da-01-en-chipled-0603-w-kl-gruen-150060gs75000-29279201.pdf?src-supplier=Conrad, ComponentLink2URL=https://datasheet.ciiva.com/29279/759427-da-01-en-chipled-0603-w-kl-gruen-150060gs75000-29279201.pdf?src-supplier=Conrad, ComponentLink3Description=https://datasheet.ciiva.com/29562/150060gs75000-29562869.pdf?src-supplier=Digi-Key, ComponentLink3URL=https://datasheet.ciiva.com/29562/150060gs75000-29562869.pdf?src-supplier=Digi-Key, ComponentLink4Description=https://datasheet.ciiva.com/29562/150060gs75000-29562870.pdf?src-supplier=Digi-Key, ComponentLink4URL=https://datasheet.ciiva.com/29562/150060gs75000-29562870.pdf?src-supplier=Digi-Key, Dominant Wavelength=520nm, Height=0.7mm, Lead Free="Lead Free", Length=1.6mm, Lens Style=Clear,Rectangular, Luminous Intensity=430mcd, Mount="Surface Mount", Packaging="Tape and Reel", Pricing 1="1=0.14000, 50=0.13300, 100=0.11400, 500=0.09900 (USD)", REACH SVHC=Unknown, RoHS=Yes, Stock 1=71509, Supplier 1=Digi-Key, Viewing Angle=140°, Wavelength=520nm, Width=0.8mm
M1 M2: library part Logic_Level_Module, "Logic Level Converter Module"
R1 R2 R3 R4 R5 R6 R7 R8 R9 R10 R11 R12 R13 R14 R15 R16 R17 R18 R19 R20 R21 R22 R23 R24 R25 R26 R27 R28 R29 R30 R31 R32 R33 R34 R35 R36 R37 R38 R39 R40 R41 R42 R43 R47 R48 R49 R50 R51 R52 R53 R54 R55 R56 R57 R58 R59 R60 R61 R62 R63 R64 R65 R66 R67 R68 R69 R70 R71 R72 R73 R74 R88 R89 R90 R93 R94 R95 R96 R97 R98 R99 R100 R101: library part RC0603JR-070RL, "YAGEO 0603 0 ohm", Manufacturer_Name=KEMET, Mouser Part Number=603-RC0603JR-070RL, Datasheet Link=https://datasheet.datasheetarchive.com/originals/distributors/Datasheets_SAMA/902f9e387b938f871d31120f5fc1d65e.pdf, Geometry.Height=0.55mm, Manufacturer_Part_Number=RC0603JR-070RL, Mouser Price/Stock=https://www.mouser.co.uk/ProductDetail/YAGEO/RC0603JR-070RL?qs=2cAdsCoAWRGWyPcuXgGiXQ%3D%3D
R44 R45: library part RC0603FR-104K7L, "YAGEO 0603 4.7k", Manufacturer_Name=KEMET, Manufacturer_Part_Number=RC0603JR-070RL, Mouser Part Number=603-RC0603JR-070RL, Datasheet Link=https://datasheet.datasheetarchive.com/originals/distributors/Datasheets_SAMA/902f9e387b938f871d31120f5fc1d65e.pdf, Geometry.Height=0.55mm, Mouser Price/Stock=https://www.mouser.co.uk/ProductDetail/YAGEO/RC0603JR-070RL?qs=2cAdsCoAWRGWyPcuXgGiXQ%3D%3D
R46 R75 R76 R77 R78 R79 R80 R81 R82 R83 R84 R85 R86 R87 R91 R92: library part RC0603FR-13180RL, "YAGEO 0603 180 ohm", Manufacturer_Name=KEMET, Manufacturer_Part_Number=RC0603JR-070RL, Mouser Part Number=603-RC0603JR-070RL, Datasheet Link=https://datasheet.datasheetarchive.com/originals/distributors/Datasheets_SAMA/902f9e387b938f871d31120f5fc1d65e.pdf, Geometry.Height=0.55mm, Mouser Price/Stock=https://www.mouser.co.uk/ProductDetail/YAGEO/RC0603JR-070RL?qs=2cAdsCoAWRGWyPcuXgGiXQ%3D%3D
TP1 TP2 TP3 TP4 TP5 TP6 TP7 TP8 TP9 TP10 TP11 TP12 TP13 TP14 TP15 TP16 TP17 TP18 TP19: Color=Black, Manufacturer=Samtec, Manufacturer Part Number=TST-105-01-G-D, Max Operating Temperature=125°C, Min Operating Temperature=-55°C, Category="Headers and Wire Housings", ComponentLink1Description=https://datasheet.ciiva.com/739/tst-mkt-739845.pdf?src-supplier=Digi-Key, ComponentLink1URL=https://datasheet.ciiva.com/739/tst-mkt-739845.pdf?src-supplier=Digi-Key, ComponentLink2Description=https://datasheet.ciiva.com/10018/htst-10018510.pdf?src-supplier=Avnet, ComponentLink2URL=https://datasheet.ciiva.com/10018/htst-10018510.pdf?src-supplier=Avnet, Connector Type="Male Pin", Contact Material=Bronze, Contact Mating Length=0.25inch, Contact Plating=Gold, Depth=9.27mm, Gender=Male, Housing Color=Black, Housing Material=Polyester, Length=27.94mm, Mount="Through Hole", Number of Contacts=16, Number of Positions=16, Number of Rows=2, Orientation=Straight, Packaging=Rail/Tube, Pitch=2.54mm, Pricing 1="1=2.85000, 10=2.73600, 100=2.28000, 500=1.93800, 1000=1.65300, 5000=1.48200 (USD)", REACH SVHC="No SVHC", RoHS=Yes, Row Spacing=0.1inch, Stock 1=227, Supplier 1=Digi-Key, Termination=Solder
U1: "WIFI Module", ComponentLink1Description="New link", ComponentLink1URL=https://www.amazon.com/gp/product/B07DKD79Y9/ref=ppx_yo_dt_b_asin_title_o00_s00?ie=UTF8&psc=1
U2: "Octal Buffers/Drivers With 3-State Outputs", Manufacturer_Name="Texas Instruments", Mouser Part Number=595-SN74ABT240ADBR, Datasheet Link=http://www.ti.com/lit/gpn/sn74abt240a, Geometry.Height=2mm, Manufacturer_Part_Number=SN74ABT240ADBR, Mouser Price/Stock=https://www.mouser.co.uk/ProductDetail/Texas-Instruments/SN74ABT240ADBR?qs=JHHQeKcAU3Dt82k%252BVyiYdw%3D%3D
U3: "Hex Inverters", Manufacturer_Name="Texas Instruments", Mouser Part Number=595-SN74AC04PWR, Datasheet Link=http://www.ti.com/lit/gpn/sn74ac04, Geometry.Height=1.2mm, Manufacturer_Part_Number=SN74AC04PWR, Mouser Price/Stock=https://www.mouser.co.uk/ProductDetail/Texas-Instruments/SN74AC04PWR?qs=RZS%252BpEsUn7pRvPNqsga4SA%3D%3D

## Free pads (board coordinates)
  round 200 hole 170: 37(200,200) 37(200,3800) 37(5400,200) 37(5400,3800)

## Via types
v1: diameter 50, hole 28, Top Layer to Bottom Layer, 98 vias

## Nets (pads, with @x,y where several pads share a name; then routed paths per layer and width w, separated by ;. In a path a pad name is that pad's centre, name@x,y a point inside that pad or via, vN(x,y) a via of type N, cw(c..) or ccw(c..) an arc to the next point about the centre after c; other vN are vias at no path point)
+3.3: H1.3 J1.1 M1.3 M2.3 R79.2 TP1.1 U1.16 U1.20 | length 13559.5
  Top Layer w10: H1.3 150,1800 130,1820 130,2150 140,2160 644.14,2160 650,2165.86 650,3570 670,3590 2564.14,3590 2570,3584.14 TP1.1 ; M1.3 3680,3300 3690,3290 3690,2875.86 3695.86,2870 4030,2870 4040,2880 4040,3290 4050,3300 M2.3 ; U1.16 4500,600 4600,500 U1.20
  Bottom Layer w10: R79.2 2563.5,3343.5 TP1.1 2570,3255.86 2575.86,3250 3384.14,3250 3390,3255.86 3390,3294.14 3395.86,3300 M1.3 ; M2.3 4290,3300 4310,3320 4310,3550 4320,3560 4994.14,3560 5000,3554.14 5000,3325.86 5005.86,3320 5510,3320 5520,3310 5520,2205.86 5514.14,2200 J1.1 5400,505.86 5394.14,500 U1.20
+5: C1.1 C2.1 C3.1 C4.1 C5.1 C6.1 C7.1 H1.1 H2.2 IC1.10 IC1.18 IC1.28 J1.3 M1.10 M2.10 R44.2 R45.2 R46.2 R75.2 R76.2 R77.2 R78.2 R80.2 R81.2 R82.2 R83.2 R84.2 R85.2 R86.2 R87.2 R91.2 R92.2 U1.17 U2.20 U3.14 | length 3955.3
  Top Layer w10: U2.20 1290,2615.39 1290,2720 1300,2730 v1(1380,2730) ; IC1.10 2120,1474.41 2120,1514.14 2125.86,1520 2170,1520 2200,1550 2300,1550 2311.26,1561.26 IC1.18 2478.74,1561.26 2520,1520 v1(2520,1480) ; v1(2200,1920) 2207.87,1912.13 2207.87,1902.02 2215.75,1894.14 IC1.28 ; v1(2250,2660) 2250,2670 2266.77,2686.77 U3.14 ; R45.2 2800,355.86 2805.86,350 v1(2870,350) 2934.14,350 2940,355.86 R44.2 ; v1(5150,1610) 5151.5,1611.5 R46.2
  Bottom Layer w10: R87.2 R86.2 R85.2 R84.2 R83.2 R82.2 R81.2 R80.2 1534.14,3343.5 1540,3337.65 ; v1(1540,3220) 1540,3337.65 ; C3.1 2110,1661.5 2110,1804.14 2115.86,1810 2201.5,1810 ; v1(2200,1920) 2200,1811.5 2201.5,1810 ; R92.2 R91.2 R77.2 R76.2 R75.2 1545.86,3343.5 1540,3337.65 ; C4.1 C5.1 C6.1 2291.5,1798.5 2280,1810 2201.5,1810 ; R78.2 2806.5,3343.5 v1(2810,3340) ; C2.1 C1.1 3789.14,491.5 3789.99,492.35 3832.35,492.35 U1.17
CPU_CS: R12.2 R41.2 R90.1 | length 4435.6
  Top Layer w10: R12.2 1020,1450 v1(1030,1460) ; v1(1680,2840) 1924.14,2840 1930,2845.86 R90.1 ; v1(2240,1050) 2239.14,1050.86 2239.14,1059.14 2240,1060 R41.2
  Bottom Layer w10: v1(1030,1460) 1022.35,1452.35 1006.49,1452.35 1004.14,1450 915.86,1450 910,1444.14 910,1055.86 915.86,1050 1830,1050 ; v1(1680,2840) 1764.14,2840 1770,2834.14 1770,2645.86 1775.86,2640 1820,2640 1825,2635 1825,2605 1820,2600 1820,1060 1830,1050 ; v1(2240,1050) 1840,1050 1830,1050
CPU_D0: R1.1 R17.1 U2.2 | length 2778.8
  Top Layer w10: R1.1 674.14,1900 680,1905.86 680,2583.71 685.86,2589.57 v1(880,2589.57) U2.2 ; v1(1770,2280) v1(2100,2280) ; R17.1 v1(2100,2170)
  Bottom Layer w10: v1(880,2589.57) 1306.29,2589.57 1370,2525.86 1764.14,2525.86 1770,2520 v1(1770,2280) ; v1(2100,2170) v1(2100,2280)
CPU_D1: R3.1 R19.1 U2.4 | length 2858.5
  Top Layer w10: R3.1 694.14,1800 700,1805.86 700,2532.53 705.86,2538.39 U2.4 ; v1(1720,2170) 2024.14,2170 2040,2154.14 R19.1
  Bottom Layer w10: v1(770,2540) 775,2535 1195,2535 1200,2530 1200,2170 1205.86,2164.14 1214.14,2164.14 1220,2170 v1(1720,2170)
CPU_D2: R6.1 R21.1 U2.6 | length 2689.2
  Top Layer w10: R6.1 710,1700 720,1710 720,2480 727.2,2487.2 U2.6 ; v1@1613.57,2120 1974.14,2120 1980,2114.14 R21.1
  Bottom Layer w10: v1(880,2490) 1170,2490 1180,2480 1180,2125.86 1185.86,2120 v1@1621.08,2120
  other v1: 1630,2120
CPU_D3: R9.1 R23.1 U2.8 | length 2555.1
  Top Layer w10: R9.1 v1(790,1600) ; v1(790,1790) 750,1790 740,1800 740,2430 746.02,2436.02 U2.8 ; v1(1740,1980) 1743.5,1976.5 R23.1
  Bottom Layer w10: v1(790,1600) v1(790,1790) 790,1960 810,1980 v1(1740,1980)
CPU_D4: R11.1 R25.1 U2.11 | length 2309.5
  Top Layer w10: R11.1@641.5,1510 R11.1 800,1500 810,1510 1104.14,1510 1110,1515.86 v1(1110,1810) ; U2.11 1485.16,2384.84 1500,2370 1500,1818.2 1494.14,1812.35 1397.35,1812.35 v1(1395,1810) ; v1(1620,1810) 1630.82,1810 1640.82,1800 R25.1
  Bottom Layer w10: v1(1110,1810) v1(1395,1810) 1397.35,1807.65 1617.65,1807.65 v1(1620,1810)
CPU_D5: R13.1 R27.1 U2.13 | length 2432.8
  Top Layer w10: R13.1 1090,1400 v1(1100,1410) ; U2.13 1514.14,2436.02 1520,2430.17 1520,1735.86 1514.14,1730 v1@1460,1730 ; v1(1670,1740) R27.1
  Bottom Layer w10: v1(1100,1410) 1204.14,1410 1210,1415.86 1210,1734.14 1215.86,1740 v1(1460,1740) ; v1@1460,1730 1649.18,1730 1659.18,1740 v1(1670,1740)
CPU_D6: R15.1 R29.1 U2.15 | length 2657.7
  Top Layer w10: R15.1 v1(1090,1300) ; U2.15 1532.8,2487.2 1540,2480 1540,1684.14 1534.14,1678.28 1455.86,1678.28 1455.23,1677.65 1427.65,1677.65 v1@1420,1670 ; v1(1620,1680) R29.1
  Bottom Layer w10: v1(1090,1300) 1404.14,1300 1410,1305.86 v1(1410,1680) ; v1@1420,1670 1427.65,1677.65 1455.23,1677.65 1455.86,1678.28 1484.14,1678.28 1485.86,1680 v1(1620,1680)
CPU_D7: R16.1 R31.1 U2.17 | length 2702.1
  Top Layer w10: R16.1 v1(1040,1200) ; U2.17 1549.14,2538.39 1555,2532.53 v1@1555,1630.86 ; v1@1565.86,1620 R31.1
  Bottom Layer w10: v1(1040,1200) 1554.14,1200 1560,1205.86 v1(1560,1630)
CPU_nInt: R7.2 R43.2 R88.1 | length 5168.1
  Top Layer w10: v1(820,2360) 780,2360 770,2350 770,1915.86 775.86,1910 925.64,1910 931.5,1904.14 R7.2 v1(1030,1650) ; v1(1280,2920) 1630,2920 1640,2930 R88.1 ; v1(2120,920) R43.2
  Bottom Layer w10: v1(820,2360) 680,2360 670,2370 670,2914.14 675.86,2920 v1(1280,2920) ; v1(1030,1650) 865.86,1650 860,1644.14 860,950 870.47,939.53 1216.37,939.53 1235.9,920 v1(2120,920)
CPU_Reset: R14.2 R20.2 R89.1 | length 3366.3
  Top Layer w10: R14.2 1174.14,1350 1180,1355.86 1180,2284.14 1185.86,2290 v1@1430,2290 ; v1(1630,2300) 1700,2300 1740,2340 2304.14,2340 2330,2314.14 R20.2 ; v1(1790,2930) R89.1
  Bottom Layer w10: v1@1430,2290 1437.65,2297.65 1453.51,2297.65 1455.86,2300 v1(1630,2300) ; v1(1790,2930) 1940,2780 v1(1940,2340)
  other v1: 1430,2300
CPU_RnW: R10.2 R42.2 R93.1 | length 4825.6
  Top Layer w10: R10.2 1020,1550 v1(1030,1560) ; v1(1830,2740) 1830,2705.86 1835.86,2700 R93.1 ; v1(2180,1100) R42.2
  Bottom Layer w10: v1(1030,1560) 1022.35,1552.35 1006.49,1552.35 1004.14,1550 885.86,1550 880,1544.14 880,985.86 885.86,980 2290,980 2310,1000 2310,1174.14 2304.14,1180 2185.86,1180 2180,1174.14 v1(2180,1100) 1845.86,1100 1840,1105.86 1840,2714.14 1837.65,2716.49 1837.65,2732.35 v1(1830,2740)
CPU_RnW_Inverted: LED15.1 U3.2 U3.3 | length 1361.9
  Top Layer w10: LED15.1 2080,2820 2060,2800 1775.86,2800 1770,2794.14 1770,2670 1778.82,2661.18 U3.2 U3.3
CS: R33.2 R67.1 | length 1250.1
  Top Layer w10: R33.2 2804.14,1400 2810,1394.14 v1@2810,1210 ; v1(3480,1100) R67.1
  Bottom Layer w10: v1(2800,1210) 3474.14,1210 3480,1204.14 v1(3480,1100)
GND: C1.2 C2.2 C3.2 C4.2 C5.2 C6.2 C7.2 H1.13 H1.15 H2.6 IC1.19 IC1.29 J1.9 J1.11 J1.13 J1.15 LED5.1 LED6.1 M1.4 M1.9 M2.4 M2.9 U1.18 U1.19 U2.1 U2.10 U2.19 U3.7 | length 1841.4
  Top Layer w10: v1(950,2700) 956.72,2706.72 1004.38,2706.72 1010.24,2700.86 U2.1 ; U2.10 1010,2384.61 1010,2295.86 1015.86,2290 v1(1070,2290) ; U2.19 1404.14,2589.57 1424.58,2610 v1(1430,2610) ; v1(2130,1580) 2137.65,1587.65 2137.65,1603.51 2140,1605.86 2140,1734.14 2145.86,1740 2147.97,1740 2179.57,1771.6 2179.57,1802.17 IC1.29 ; U3.7 2246.77,2533.23 2252.63,2539.09 2252.63,2547.37 2250,2550 v1(2250,2560) ; v1@2142.76,1592.76 IC1.19 ; v1(2330,3350) 2336.5,3343.5 LED6.1 ; v1(2690,3200) LED5.1
  Bottom Layer w10: v1(2130,1580) 2150,1580 2171.5,1601.5 C3.2 ; C4.2 C5.2 C3.2 ; C6.2 C7.2 C3.2 ; C2.2 C1.2 3752.95,428.5 3763.7,417.76 3763.7,414.8 3778.5,400 U1.18
GPIO_0: R60.2 R73.2 | length 2680.4
  Top Layer w10: R73.2 3480,1200 3480,1244.14 3485.86,1250 v1(4310,1250) ; v1(4480,1250) 4570,1250 4590,1270 v1(4590,2110) ; v1(4590,2550) R60.2
  Bottom Layer w10: v1(4310,1250) v1(4480,1250) ; v1(4590,2110) v1(4590,2550)
GPIO_1: R56.2 R70.2 | length 3261.8
  Top Layer w10: R70.2 3480,800 3480,840 3490,850 v1(4320,850) ; v1(4520,1020) 4640,1020 4650,1030 4650,2029.18 4660,2039.18 v1(4660,2050) ; v1(4650,2460) 4650,2455.86 4655.86,2450 R56.2
  Bottom Layer w10: v1(4320,850) 4644.14,850 4650,855.86 4650,1014.14 4644.14,1020 v1(4520,1020) ; v1(4650,2460) 4650,2449.18 4660,2439.18 v1(4660,2050)
MISO: R37.2 R57.1 | length 2530.9
  Top Layer w10: R37.2 2360,965.86 2365.86,960 2640,960 2650,970 v1(2650,1040) ; v1(3000,950) 3250,950 3262.93,962.93 3262.93,1897.07 3265.86,1900 R57.1
  Bottom Layer w10: v1(2650,1040) 2650,960 2670,940 2974.14,940 2976.49,942.35 2992.35,942.35 v1(3000,950)
MOSI: R39.2 R61.1 | length 2485.9
  Top Layer w10: R39.2 2300,875.86 2305.86,870 2629.18,870 2631.52,872.35 v1@2652.35,872.35 ; v1(3000,870) 3005.86,870 3025.86,890 3294.14,890 3300,895.86 3300,1800 R61.1
  Bottom Layer w10: v1@2660,880 2979.18,880 2989.18,870 v1(3000,870)
  other v1: 2650,880
NetH1_2: H1.2 R1.2 | length 268.5
  Top Layer w10: H1.2 R1.2
NetH1_4: H1.4 R3.2 | length 268.5
  Top Layer w10: H1.4 R3.2
NetH1_5: H1.5 R7.1 | length 689.2
  Top Layer w10: H1.5 250,1650 R7.1
NetH1_6: H1.6 R6.2 | length 268.5
  Top Layer w10: H1.6 R6.2
NetH1_7: H1.7 R10.1 | length 689.2
  Top Layer w10: H1.7 250,1550 R10.1
NetH1_8: H1.8 R9.2 | length 268.5
  Top Layer w10: H1.8 R9.2
NetH1_9: H1.9 R12.1 | length 689.2
  Top Layer w10: H1.9 250,1450 R12.1
NetH1_10: H1.10 R11.2 | length 280
  Top Layer w10: H1.10 R11.2 R11.2@580,1500
NetH1_11: H1.11 R14.1 | length 689.2
  Top Layer w10: H1.11 250,1350 R14.1
NetH1_12: H1.12 R13.2 | length 268.5
  Top Layer w10: H1.12 R13.2
NetH1_14: H1.14 R15.2 | length 268.5
  Top Layer w10: H1.14 R15.2
NetH1_16: H1.16 R16.2 | length 268.5
  Top Layer w10: H1.16 R16.2
NetH2_1: H2.1 R2.2 | length 198.5
  Top Layer w10: R2.2 H2.1
NetH2_3: H2.3 R4.2 | length 198.5
  Top Layer w10: R4.2 H2.3
NetH2_4: H2.4 R5.1 | length 178.5
  Top Layer w10: H2.4 R5.1
NetH2_5: H2.5 R8.2 | length 198.5
  Top Layer w10: R8.2 H2.5
NetIC1_1: IC1.1 R23.2 | length 315.4
  Top Layer w10: R23.2 1910,1860 1940,1830 1940,1756.09 1945.86,1750.24 IC1.1
NetIC1_2: IC1.2 R25.2 | length 295.5
  Top Layer w10: R25.2 1900,1800 1910,1790 1910,1730 1921.26,1718.74 IC1.2
NetIC1_3: IC1.3 R27.2 | length 270.9
  Top Layer w10: R27.2 1884.14,1740 1890,1734.14 1890,1695.86 1895.86,1690 2030.39,1690 IC1.3
NetIC1_4: IC1.4 R29.2 | length 236.7
  Top Layer w10: R29.2 1864.14,1680 1888.39,1655.75 IC1.4
NetIC1_5: IC1.5 R31.2 | length 228.4
  Top Layer w10: R31.2 2028.9,1620 IC1.5
NetIC1_6: IC1.6 R34.2 | length 250.9
  Top Layer w10: R34.2 1884.14,1560 1890,1565.86 1890,1584.14 1895.86,1590 2030.39,1590 IC1.6
NetIC1_7: IC1.7 R36.2 | length 280.3
  Top Layer w10: R36.2 1904.14,1500 1910,1505.86 1910,1554.14 1915.86,1560 1920,1560 1921.26,1561.26 IC1.7
NetIC1_8: IC1.8 R38.2 | length 305
  Top Layer w10: R38.2 1940,1440 1950,1450 1950,1520 1960,1530 2032.91,1530 IC1.8
NetIC1_9: IC1.9 R40.2 | length 244
  Top Layer w10: R40.2 2060,1370 2089.76,1399.76 IC1.9
NetIC1_11: IC1.11 R43.1 | length 245.2
  Top Layer w10: R43.1 2120,1320 2152.76,1352.76 IC1.11
NetIC1_12: IC1.12 R42.1 | length 233.4
  Top Layer w10: R42.1 2184.25,1245.75 IC1.12
NetIC1_13: IC1.13 R41.1 | length 241.7
  Top Layer w10: IC1.13 2215.75,1334.25 2240,1310 R41.1
NetIC1_14: IC1.14 R39.1 | length 267.6
  Top Layer w10: IC1.14 2247.24,1362.76 2270,1340 2294.14,1340 2300,1334.14 R39.1
NetIC1_15: IC1.15 R37.1 | length 306.1
  Top Layer w10: IC1.15 2278.74,1375.86 2284.6,1370 2354.14,1370 2360,1364.14 R37.1
NetIC1_16: IC1.16 R35.1 | length 328.7
  Top Layer w10: IC1.16 2310.24,1405.86 2316.09,1400 2404.14,1400 2410,1394.14 2410,1251.5 R35.1
NetIC1_17: IC1.17 R33.1 | length 312.1
  Top Layer w10: IC1.17 2450.24,1529.76 2450.24,1415.86 2456.09,1410 2548.5,1410 R33.1
NetIC1_20: IC1.20 R32.1 | length 214.4
  Top Layer w10: IC1.20 2435.75,1624.25 2478.74,1581.26 2547.76,1581.26 2558.5,1570.51 R32.1
NetIC1_21: IC1.21 R30.1 | length 202.3
  Top Layer w10: IC1.21 2460.11,1655.75 2475.86,1640 2548.5,1640 R30.1
NetIC1_22: IC1.22 R28.1 | length 192.8
  Top Layer w10: IC1.22 2477.24,1687.24 2480,1690 R28.1
NetIC1_23: IC1.23 R26.1 | length 216.1
  Top Layer w10: IC1.23 2454.14,1718.74 2460,1724.6 2460,1744.14 2465.86,1750 R26.1
NetIC1_24: IC1.24 R24.1 | length 239.8
  Top Layer w10: IC1.24 2430.24,1750.24 2440,1760 2440,1800 2450,1810 R24.1
NetIC1_25: IC1.25 R22.1 | length 240.7
  Top Layer w10: IC1.25 2310,1807.09 2310,1874.14 2315.86,1880 2360,1880 2390,1910 R22.1
NetIC1_26: IC1.26 R20.1 | length 202.9
  Top Layer w10: IC1.26 2278.74,1888.74 2330,1940 R20.1
NetIC1_27: IC1.27 R18.1 | length 191.1
  Top Layer w10: IC1.27 2247.24,1887.24 2270,1910 R18.1
NetIC1_30: IC1.30 R17.2 | length 203.5
  Top Layer w10: R17.2 2100,1930 2152.76,1877.24 IC1.30
NetIC1_31: IC1.31 R19.2 | length 217.7
  Top Layer w10: R19.2 2040,1925.86 2045.86,1920 2050,1920 2121.26,1848.74 IC1.31
NetIC1_32: IC1.32 R21.2 | length 274
  Top Layer w10: R21.2 1980,1880 2000,1860 2080,1860 2089.76,1850.24 IC1.32
NetJ1_2: J1.2 R51.2 | length 243.5
  Top Layer w10: R51.2 J1.2
NetJ1_4: J1.4 R53.2 | length 243.5
  Top Layer w10: R53.2 J1.4
NetJ1_5: J1.5 R56.1 | length 620.7
  Top Layer w10: R56.1 5350,2450 J1.5
NetJ1_6: J1.6 R55.2 | length 243.5
  Top Layer w10: R55.2 J1.6
NetJ1_7: J1.7 R60.1 | length 620.7
  Top Layer w10: R60.1 5350,2550 J1.7
NetJ1_8: J1.8 R59.2 | length 243.5
  Top Layer w10: R59.2 J1.8
NetJ1_10: J1.10 R63.2 | length 243.5
  Top Layer w10: R63.2 J1.10
NetJ1_12: J1.12 R66.2 | length 243.5
  Top Layer w10: R66.2 J1.12
NetJ1_14: J1.14 R69.2 | length 243.5
  Top Layer w10: R69.2 J1.14
NetJ1_16: J1.16 R71.2 | length 243.5
  Top Layer w10: R71.2 J1.16
NetLED1_1: LED1.1 R72.1 | length 303.5
  Top Layer w10: R72.1 5031.5,1371.5 5040,1380 LED1.1
NetLED1_2: LED1.2 R46.1 | length 105.5
  Top Layer w10: LED1.2 R46.1
NetLED2_1: LED2.1 R88.2 | length 262
  Top Layer w10: R88.2 LED2.1
NetLED2_2: LED2.2 R75.1 | length 147
  Top Layer w10: LED2.2 v1(1640,3480)
  Bottom Layer w10: R75.1 v1(1640,3480)
NetLED3_1: LED3.1 R89.2 | length 262
  Top Layer w10: R89.2 LED3.1
NetLED3_2: LED3.2 R76.1 | length 147
  Top Layer w10: LED3.2 v1(1790,3480)
  Bottom Layer w10: R76.1 v1(1790,3480)
NetLED4_1: LED4.1 R90.2 | length 262
  Top Layer w10: R90.2 LED4.1
NetLED4_2: LED4.2 R77.1 | length 147
  Top Layer w10: LED4.2 v1(1930,3480)
  Bottom Layer w10: R77.1 v1(1930,3480)
NetLED5_2: LED5.2 R78.1 | length 147
  Top Layer w10: LED5.2 v1(2690,3480)
  Bottom Layer w10: R78.1 v1(2690,3480)
NetLED6_2: LED6.2 R79.1 | length 167
  Top Layer w10: LED6.2 v1@2450,3490
  Bottom Layer w10: R79.1 v1@2450,3490
  other v1: 2450,3480
NetLED7_1: LED7.1 U2.18 | length 935.9
  Top Layer w10: U2.18 1285.91,2567.83 1252.17,2567.83 1210,2610 1210,3020 1460,3270 LED7.1
NetLED7_2: LED7.2 R80.1 | length 147
  Top Layer w10: LED7.2 v1(1460,3480)
  Bottom Layer w10: R80.1 v1(1460,3480)
NetLED8_1: LED8.1 U2.16 | length 981.6
  Top Layer w10: U2.16 1215.86,2512.8 1195,2533.65 1195,3039.14 1360,3204.14 LED8.1
NetLED8_2: LED8.2 R81.1 | length 147
  Top Layer w10: LED8.2 v1(1360,3480)
  Bottom Layer w10: R81.1 v1(1360,3480)
NetLED9_1: LED9.1 U2.14 | length 1002.3
  Top Layer w10: LED9.1 1250,3333.5 1250,3130 1180,3060 1180,2500 1218.39,2461.61 U2.14
NetLED9_2: LED9.2 R82.1 | length 147
  Top Layer w10: LED9.2 v1(1260,3480)
  Bottom Layer w10: R82.1 v1(1260,3480)
NetLED10_1: LED10.1 U2.12 | length 1047.7
  Top Layer w10: LED10.1 1160,3141.21 1165,3136.21 1165,2431.29 1185.86,2410.43 U2.12
NetLED10_2: LED10.2 R83.1 | length 147
  Top Layer w10: LED10.2 v1(1160,3480)
  Bottom Layer w10: R83.1 v1(1160,3480)
NetLED11_1: LED11.1 U2.9 | length 1106.7
  Top Layer w10: U2.9 1144.14,2410.43 1150,2416.29 1150,3050 1060,3140 LED11.1
NetLED11_2: LED11.2 R84.1 | length 147
  Top Layer w10: LED11.2 v1(1060,3480)
  Bottom Layer w10: R84.1 v1(1060,3480)
NetLED12_1: LED12.1 U2.7 | length 1071.3
  Top Layer w10: LED12.1 960,3210 1135,3035 1135,2475 1121.61,2461.61 U2.7
NetLED12_2: LED12.2 R85.1 | length 147
  Top Layer w10: LED12.2 v1(960,3480)
  Bottom Layer w10: R85.1 v1(960,3480)
NetLED13_1: LED13.1 U2.5 | length 1030.8
  Top Layer w10: LED13.1 860,3281.21 1120,3021.21 1120,2545.86 1084.14,2510 U2.5@1009.36,2510
NetLED13_2: LED13.2 R86.1 | length 147
  Top Layer w10: LED13.2 v1(860,3480)
  Bottom Layer w10: R86.1 v1(860,3480)
NetLED14_1: LED14.1 U2.3 | length 1071.9
  Top Layer w10: LED14.1 760,3225.86 765.86,3220 900,3220 1100,3020 1100,2605.86 1054.14,2560 U2.3@1004.14,2560
NetLED14_2: LED14.2 R87.1 | length 147
  Top Layer w10: LED14.2 v1(760,3480)
  Bottom Layer w10: R87.1 v1(760,3480)
NetLED15_2: LED15.2 R91.1 | length 147.7
  Top Layer w10: LED15.2 2080,3470 2079.14,3470.86 2079.14,3479.14 v1(2080,3480)
  Bottom Layer w10: R91.1 v1(2080,3480)
NetLED16_1: LED16.1 U3.4 | length 1534.5
  Top Layer w10: v1(2030,3230) 2030,2825.86 2024.14,2820 1755.86,2820 1750,2814.14 1750,2660 1770,2640 2050,2640 2080,2610 U3.4 ; v1(2200,3230) 2200,3338.5 LED16.1
  Bottom Layer w10: v1(2030,3230) 2190,3230 2190.86,3230.86 2199.14,3230.86 v1(2200,3230)
NetLED16_2: LED16.2 R92.1 | length 137
  Top Layer w10: LED16.2 v1@2205,3475
  Bottom Layer w10: R92.1 v1@2205,3475
  other v1: 2205,3480
NetM1_1: M1.1 R48.2 | length 4181.6
  Top Layer w10: R48.2 v1(5110,1100)
  Bottom Layer w10: M1.1 3614.14,3500 3620,3494.14 3620,2970 3540,2890 3540,2465.86 3545.86,2460 4110,2460 4110,1155.86 4115.86,1150 5104.14,1150 5110,1144.14 v1(5110,1100)
NetM1_2: M1.2 R50.2 | length 4470.7
  Top Layer w10: R50.2 5104.14,1200 5110,1205.86 v1(5110,1250)
  Bottom Layer w10: M1.2 3445.86,3400 3440,3405.86 3440,3594.14 3445.86,3600 3634.14,3600 3640,3594.14 3640,2950 3570,2880 3565.86,2880 3560,2874.14 3560,2485.86 3565.86,2480 4114.14,2480 4125,2469.14 4125,1395.86 4130.86,1390 4564.14,1390 4570,1384.14 4570,1300 4620,1250 v1(5110,1250)
NetM1_5: M1.5 R52.2 | length 1791.4
  Top Layer w10: v1(3450,1510) 3460,1500 R52.2
  Bottom Layer w10: v1(3450,1510) 3450,1515.86 3430,1535.86 3430,3090 3440,3100 M1.5
NetM1_6: M1.6 R54.2 | length 3640.2
  Top Layer w10: R54.2 v1(5110,1000)
  Bottom Layer w10: M1.6 3506.3,2435.86 3512.16,2430 4090,2430 4090,1110 4600,1110 4660,1050 5104.14,1050 5110,1044.14 v1(5110,1000)
NetM1_7: M1.7 R59.1 | length 3257.4
  Top Layer w10: M1.7 3800,3000 3780,3020 3780,3690 3830,3740 4490,3740 4510,3720 4510,2505.86 4515.86,2500 R59.1
NetM1_8: M1.8 R55.1 | length 3177.4
  Top Layer w10: M1.8 3805.86,3100 3800,3105.86 3800,3670 3840,3710 4484.14,3710 4490,3704.14 4490,2410 4500,2400 R55.1
NetM1_11: M1.11 R53.1 | length 2886.6
  Top Layer w10: M1.11 3850,3400 3825,3425 3825,3645 3870,3690 4458.79,3690 4470,3678.79 4470,2295.86 4475.86,2290 4983.5,2290 R53.1
NetM1_12: M1.12 R51.1 | length 2703.2
  Top Layer w10: M1.12 3900,3654.14 3905.86,3660 4444.14,3660 4450,3654.14 4450,2205.86 4455.86,2200 R51.1
NetM2_1: M2.1 R58.2 | length 3648.5
  Top Layer w10: M2.1 4404.14,3500 4410,3494.14 4410,855.86 4415.86,850 5094.14,850 5100,844.14 5100,805.86 5094.14,800 R58.2
NetM2_2: M2.2 R62.2 | length 4065.9
  Top Layer w10: M2.2 4198.65,3392.35 4182.79,3392.35 4180.44,3390 4140,3390 4110,3420 4110,3614.14 4115.86,3620 4424.14,3620 4430,3614.14 4430,960 4440,950 5094.14,950 5100,944.14 5100,915.86 5094.14,910 5041.5,910 R62.2
NetM2_5: M2.5 R65.2 | length 2701.1
  Top Layer w10: R65.2 3515.86,1600 3510,1605.86 3510,1644.14 3515.86,1650 4340,1650 4360,1670 4360,2910 4350,2920 4125.86,2920 4120,2925.86 4120,3090 4130,3100 M2.5
NetM2_7: M2.7 R71.1 | length 490.1
  Top Layer w10: v1(4940,3000) 4940,2905.86 4945.86,2900 R71.1
  Bottom Layer w10: M2.7 v1(4940,3000)
NetM2_8: M2.8 R69.1 | length 761.5
  Top Layer w10: v1(4940,3100) 4890,3050 4890,2805.86 4895.86,2800 R69.1
  Bottom Layer w10: M2.8 4930,3100 4930.86,3099.14 4939.14,3099.14 v1(4940,3100)
NetM2_11: M2.11 R66.1 | length 1152.5
  Top Layer w10: v1(4910,3400) 4900,3400 4870,3370 4870,2705.86 4875.86,2700 R66.1
  Bottom Layer w10: M2.11 v1(4910,3400)
NetM2_12: M2.12 R63.1 | length 1278.4
  Top Layer w10: M2.12 4834.14,3500 4840,3494.14 4840,2620 4860,2600 R63.1
NetR4_1: R4.1 TP2.1 | length 295.1
  Top Layer w10: TP2.1 590,805.86 595.86,800 R4.1
NetR5_2: R5.2 TP3.1 | length 208.5
  Top Layer w10: R5.2 TP3.1
NetR8_1: R8.1 TP4.1 | length 286.8
  Top Layer w10: TP4.1 690,650 700,660 700,690 710,700 R8.1
NetR22_2: R22.2 TP5.1 | length 210.6
  Top Layer w10: R22.2 2598.5,2051.5 TP5.1
NetR24_2: R24.2 TP6.1 | length 501.6
  Top Layer w10: R24.2 2944.14,1810 2950,1815.86 2950,1894.14 2955.86,1900 TP6.1
NetR26_2: R26.2 TP7.1 | length 439.2
  Top Layer w10: R26.2 2940,1750 2950,1740 2950,1725.86 2955.86,1720 TP7.1
NetR28_2: R28.2 TP8.1 | length 549.9
  Top Layer w10: R28.2 2964.14,1690 2970,1684.14 2970,1645.86 2975.86,1640 3020,1640 3040,1620 TP8.1
NetR30_2: R30.2 TP9.1 | length 681.6
  Top Layer w10: R30.2 2935.52,1630 2941.38,1624.14 2941.38,1365.86 2947.24,1360 TP9.1
NetR34_1: R34.1 TP10.1 | length 537.6
  Top Layer w10: TP10.1 1300,1570 1310,1560 R34.1
NetR36_1: R36.1 TP11.1 | length 451.8
  Top Layer w10: TP11.1 1530,1480 1540,1490 1542.95,1490 1552.95,1500 R36.1
NetR47_2: R47.2 U1.1 | length 208.5
  Top Layer w10: R47.2 U1.1
NetR48_1: R48.1 U1.26 | length 228.5
  Top Layer w10: U1.26 R48.1
NetR49_2: R49.2 U1.2 | length 208.5
  Top Layer w10: R49.2 U1.2
NetR50_1: R50.1 U1.27 | length 228.5
  Top Layer w10: U1.27 R50.1
NetR52_1: R52.1 U1.7 | length 208.5
  Top Layer w10: R52.1 U1.7
NetR54_1: R54.1 U1.25 | length 228.5
  Top Layer w10: U1.25 R54.1
NetR57_2: R57.2 U1.3 | length 208.5
  Top Layer w10: R57.2 U1.3
NetR58_1: R58.1 U1.23 | length 228.5
  Top Layer w10: U1.23 R58.1
NetR61_2: R61.2 U1.4 | length 208.5
  Top Layer w10: R61.2 U1.4
NetR62_1: R62.1 U1.24 | length 228.5
  Top Layer w10: U1.24 R62.1
NetR64_2: R64.2 U1.5 | length 208.5
  Top Layer w10: R64.2 U1.5
NetR65_1: R65.1 U1.6 | length 208.5
  Top Layer w10: R65.1 U1.6
NetR67_2: R67.2 U1.11 | length 208.5
  Top Layer w10: R67.2 U1.11
NetR68_1: R68.1 U1.13 | length 208.5
  Top Layer w10: R68.1 U1.13
NetR70_1: R70.1 U1.14 | length 208.5
  Top Layer w10: R70.1 U1.14
NetR72_2: R72.2 U1.28 | length 228.5
  Top Layer w10: U1.28 R72.2
NetR73_1: R73.1 U1.10 | length 208.5
  Top Layer w10: R73.1 U1.10
NetR74_2: R74.2 U1.22 | length 228.5
  Top Layer w10: U1.22 R74.2
NetR93_2: R93.2 U3.1 | length 158.3
  Top Layer w10: R93.2 2040,2700 2053.23,2686.77 U3.1
NetR94_1: R94.1 TP12.1 | length 278.5
  Top Layer w10: TP12.1 R94.1
NetR94_2: R94.2 U3.5 | length 159.3
  Top Layer w10: R94.2 2054.14,2600 2069.73,2584.41 U3.5
NetR95_1: R95.1 U3.6 | length 199.6
  Top Layer w10: R95.1 2014.14,2500 2020,2505.86 2020,2544.14 2034.68,2558.82 U3.6
NetR95_2: R95.2 TP13.1 | length 375.1
  Top Layer w10: TP13.1 1640,2494.14 1645.86,2500 R95.2
NetR96_1: R96.1 TP14.1 | length 433.4
  Top Layer w10: R96.1 2740,2520 2760,2500 2760,2405.86 2765.86,2400 TP14.1
NetR96_2: R96.2 U3.9 | length 208.9
  Top Layer w10: U3.9 2471.18,2558.82 2510,2520 R96.2
NetR97_1: R97.1 U3.8 | length 243.2
  Top Layer w10: U3.8 2456.77,2533.23 2490,2500 2490,2465.86 2495.86,2460 R97.1
NetR97_2: R97.2 TP15.1 | length 659.2
  Top Layer w10: R97.2 2710,2460 2740,2430 2740,2320 2760,2300 TP15.1
NetR98_1: R98.1 TP16.1 | length 347.5
  Top Layer w10: R98.1 2810,2640 2830,2620 2830,2615.86 2835.86,2610 2940,2610 TP16.1
NetR98_2: R98.2 U3.11 | length 216
  Top Layer w10: U3.11 2484.14,2610 2490,2615.86 2490,2634.14 2495.86,2640 R98.2
NetR99_1: R99.1 U3.10 | length 194.7
  Top Layer w10: U3.10 2554.09,2584.41 R99.1
NetR99_2: R99.2 TP17.1 | length 587.5
  Top Layer w10: R99.2 2800,2580 2830,2550 2830,2505.86 2835.86,2500 TP17.1
NetR100_1: R100.1 TP18.1 | length 345.1
  Top Layer w10: R100.1 2820,2760 2860,2800 TP18.1
NetR100_2: R100.2 U3.13 | length 274.8
  Top Layer w10: U3.13 2431.18,2661.18 2450,2680 2450,2750 2460,2760 R100.2
NetR101_1: R101.1 U3.12 | length 245.4
  Top Layer w10: U3.12 2455.59,2635.59 2470,2650 2470,2694.14 2475.86,2700 R101.1
NetR101_2: R101.2 TP19.1 | length 528.5
  Top Layer w10: R101.2 TP19.1
SCK: R35.2 R64.1 | length 2833.8
  Top Layer w10: R35.2 2420,1120 2450,1090 2774.14,1090 2776.49,1092.35 2792.35,1092.35 v1(2800,1100) ; v1@3010,780 3300,780 3341.8,821.8 3341.8,1694.14 3347.65,1700 R64.1
  Bottom Layer w10: v1@2823.51,1092.35 2807.65,1092.35 v1(2800,1100) 2860,1100 2870,1110 2870,1170 2880,1180 3114.14,1180 3120,1174.14 3120,785.86 3114.14,780 v1(3000,780)
SCL: R40.1 R44.1 R49.1 | length 3526.6
  Top Layer w10: R40.1 2060,810 2080,790 v1(2650,790) ; v1(2860,740) 2860,620 2880,600 2934.14,600 2940,594.14 R44.1 ; v1@3215,1045 3215,1980 3235,2000 R49.1
  Bottom Layer w10: v1(2650,790) 2854.14,790 2860,784.14 v1(2860,740) 2860,695.86 2865.86,690 3204.14,690 3210,695.86 v1(3210,1040)
SDA: R38.1 R45.1 R47.1 | length 4108
  Top Layer w10: R38.1 1743.5,1437.05 1760,1420.55 1760,1000 1790,970 1790,670 1800,660 2764.14,660 2800,695.86 ; R45.1 2800,695.86 ; v1@2800,1005.25 v1(2800,1000) 2800,695.86 ; v1@3010,1110 3160,1110 3170,1120 3170,2070 3200,2100 R47.1
  Bottom Layer w10: v1@2799.76,1000 2910,1000 2920,1010 2920,1104.14 2925.86,1110 v1(3000,1110)
UART0_RX: M2.6 R68.2 | length 3231.9
  Top Layer w10: R68.2 3558.5,910 3485.86,910 3480,915.86 3480,944.14 3485.86,950 4360,950 4380,970 4380,2990 4370,3000 M2.6
UPDI: R2.1 R18.2 | length 2914.7
  Top Layer w10: R2.1 840,901.5 840,1054.14 845.86,1060 1220,1060 1220,2200 1250,2230 v1@1430,2230 ; v1@1620,2230 2264.14,2230 2270,2224.14 R18.2
  Bottom Layer w10: v1@1430,2230 v1@1620,2230
  other v1: 1430,2220 1630,2220
WiFi_Rst: R32.2 R74.1 | length 3520.9
  Top Layer w10: R32.2 2910,1570 2920,1560 2920,1280 2920,655.86 2925.86,650 5104.14,650 5110,655.86 5110,694.14 5104.14,700 R74.1
pads on no net: U1.8 U1.9 U1.12 U1.15 U1.21 U1.29 U1.30 U1.31 U1.32 U1.33 U1.34 U1.35 U1.36

## Polygon pours and split planes (outlines as drawn)
no net on Bottom Layer "NONET_L04_P001" (solid, pour order 1): 0,0 0,4000 5600,4000 5600,0
no net on Top Layer "NONET_L01_P000" (solid, pour order 0): 0,0 0,4000 5600,4000 5600,0
+5 on Layer 2 (split plane): 5579.9,20.1 20.1,20.1 20.1,3979.9 5579.9,3979.9
GND on Plane(Gnd) (split plane): 5579.9,20.1 20.1,20.1 20.1,3979.9 5579.9,3979.9

## Silkscreen, mask and mechanical layers (free items; w line width, h text height)
Top Overlay:
  lines w10: 717,3480 1527,3480 1527,3580 717,3580 717,3480 ; 717.5,3595 2292.5,3595 2292.5,3695 717.5,3695 717.5,3595 ; 1542,3480 2292,3480 2292,3580 1542,3580 1542,3480 ; 2310,3480 2810,3480 2810,3580 2310,3580 2310,3480 ; 2310,3595 2810,3595 2810,3695 2310,3695 2310,3595
  text "ABS Data Systems, Inc, (c) Copyright 2025" at 1410,3829.99 h60
  text "CPU Bus and Control" at 1190,3630 h40
  text "Power" at 2470,3620 h40
  text "Int" at 1595,3511.5 h40
  text "3.3V" at 2395,3511.5 h40
  text "5V" at 2655.78,3511.5 h40
  text "D7" at 735,3510 h40
  text "D6" at 835,3510 h40
  text "D5" at 935,3510 h40
  text "D4" at 1035,3510 h40
  text "D3" at 1135,3510 h40
  text "D2" at 1235,3510 h40
  text "D1" at 1335,3510 h40
  text "D0" at 1435,3510 h40
  text "Rst" at 1735,3510 h40
  text "CS" at 1895,3510 h40
  text "RD" at 2050,3510 h40
  text "WR" at 2175,3510 h40
  text "P/N Wifi- 32958" at 2910,110 h60
  text "Version 1.1" at 3910,110 h60
Mechanical 1:
  the board outline again, w10

## Text inside footprints (layer, text, board x,y; h text height)
H2: Top Overlay "6" at 1180,630 h50 r270; Top Overlay "5" at 1080,630 h50 r270; Top Overlay "2" at 1180,1000 h50 r270; Top Overlay "1" at 1080,980 h50 r270